# Altium PCB ee453_pcb_KangTouraj.PcbDoc (part 1 of 2)
Units mil, origin at the board's own origin, x right, y up, seen from the top; angles counter-clockwise.
Board outline 6000 x 5000 mil, 4 copper layers (Top Layer, PWR, GND, Bottom Layer), stack 53.912 mil thick; 92 components, 61 nets, 368 pads, 47 vias.
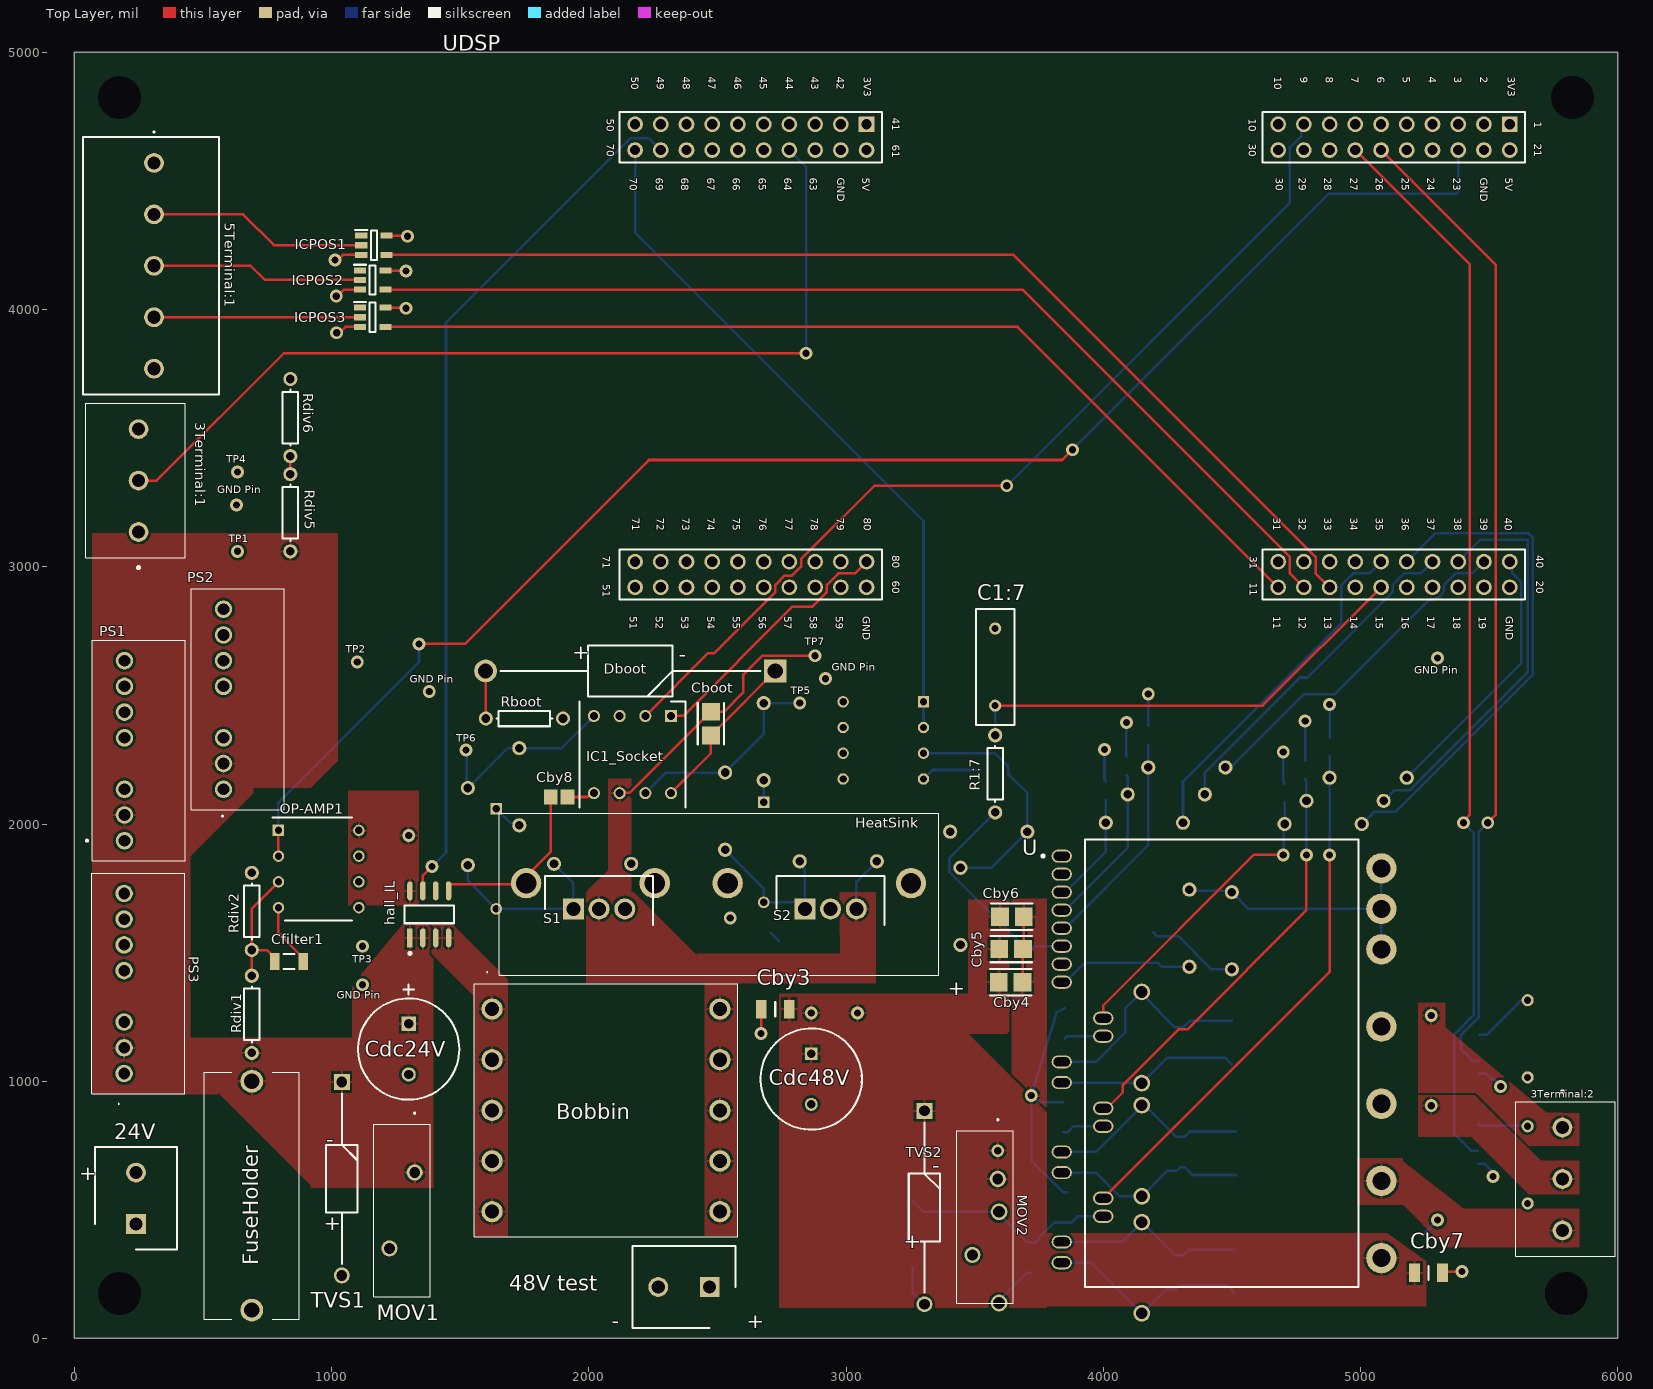
[diagram p0: Top Layer view]
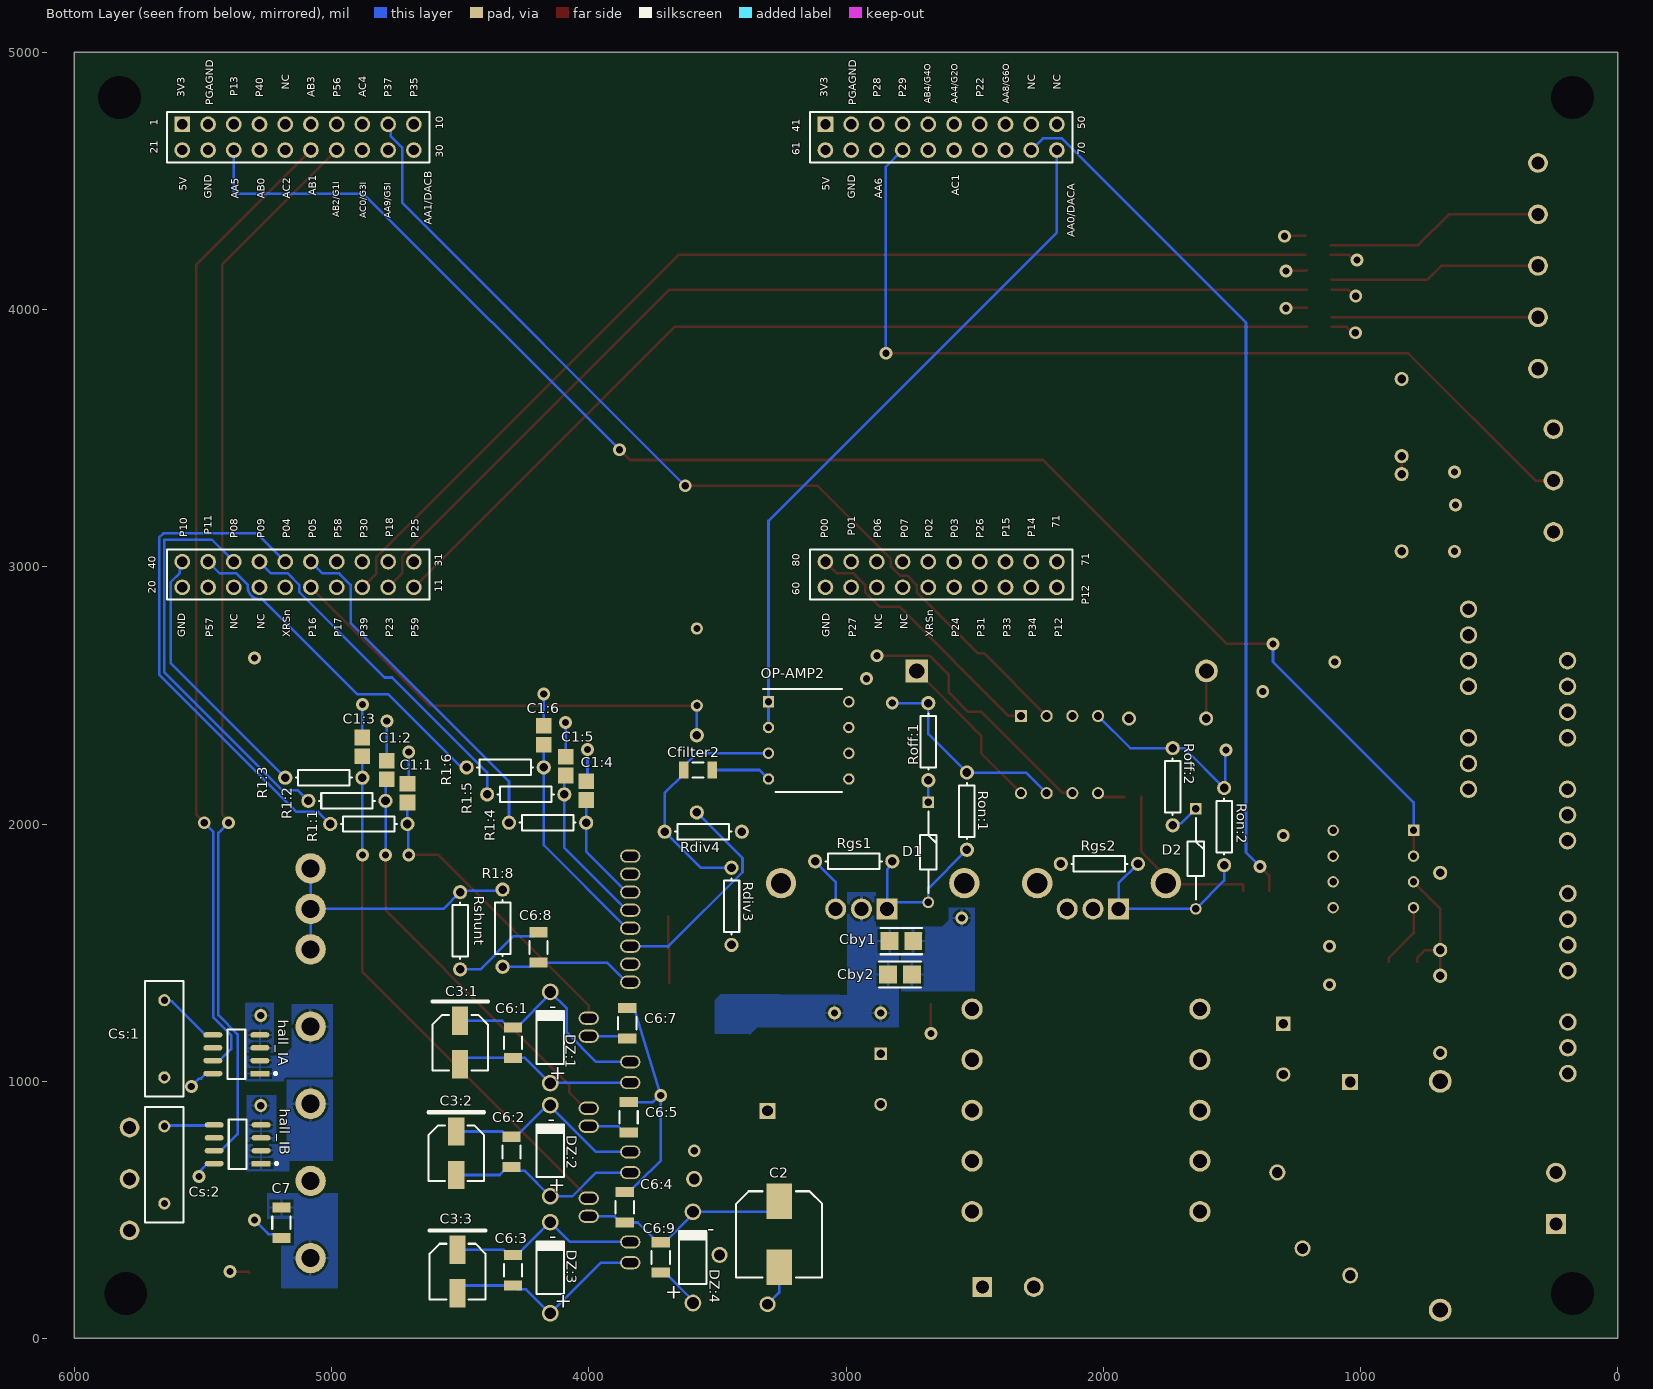
[diagram p1: Bottom Layer view, seen from below]
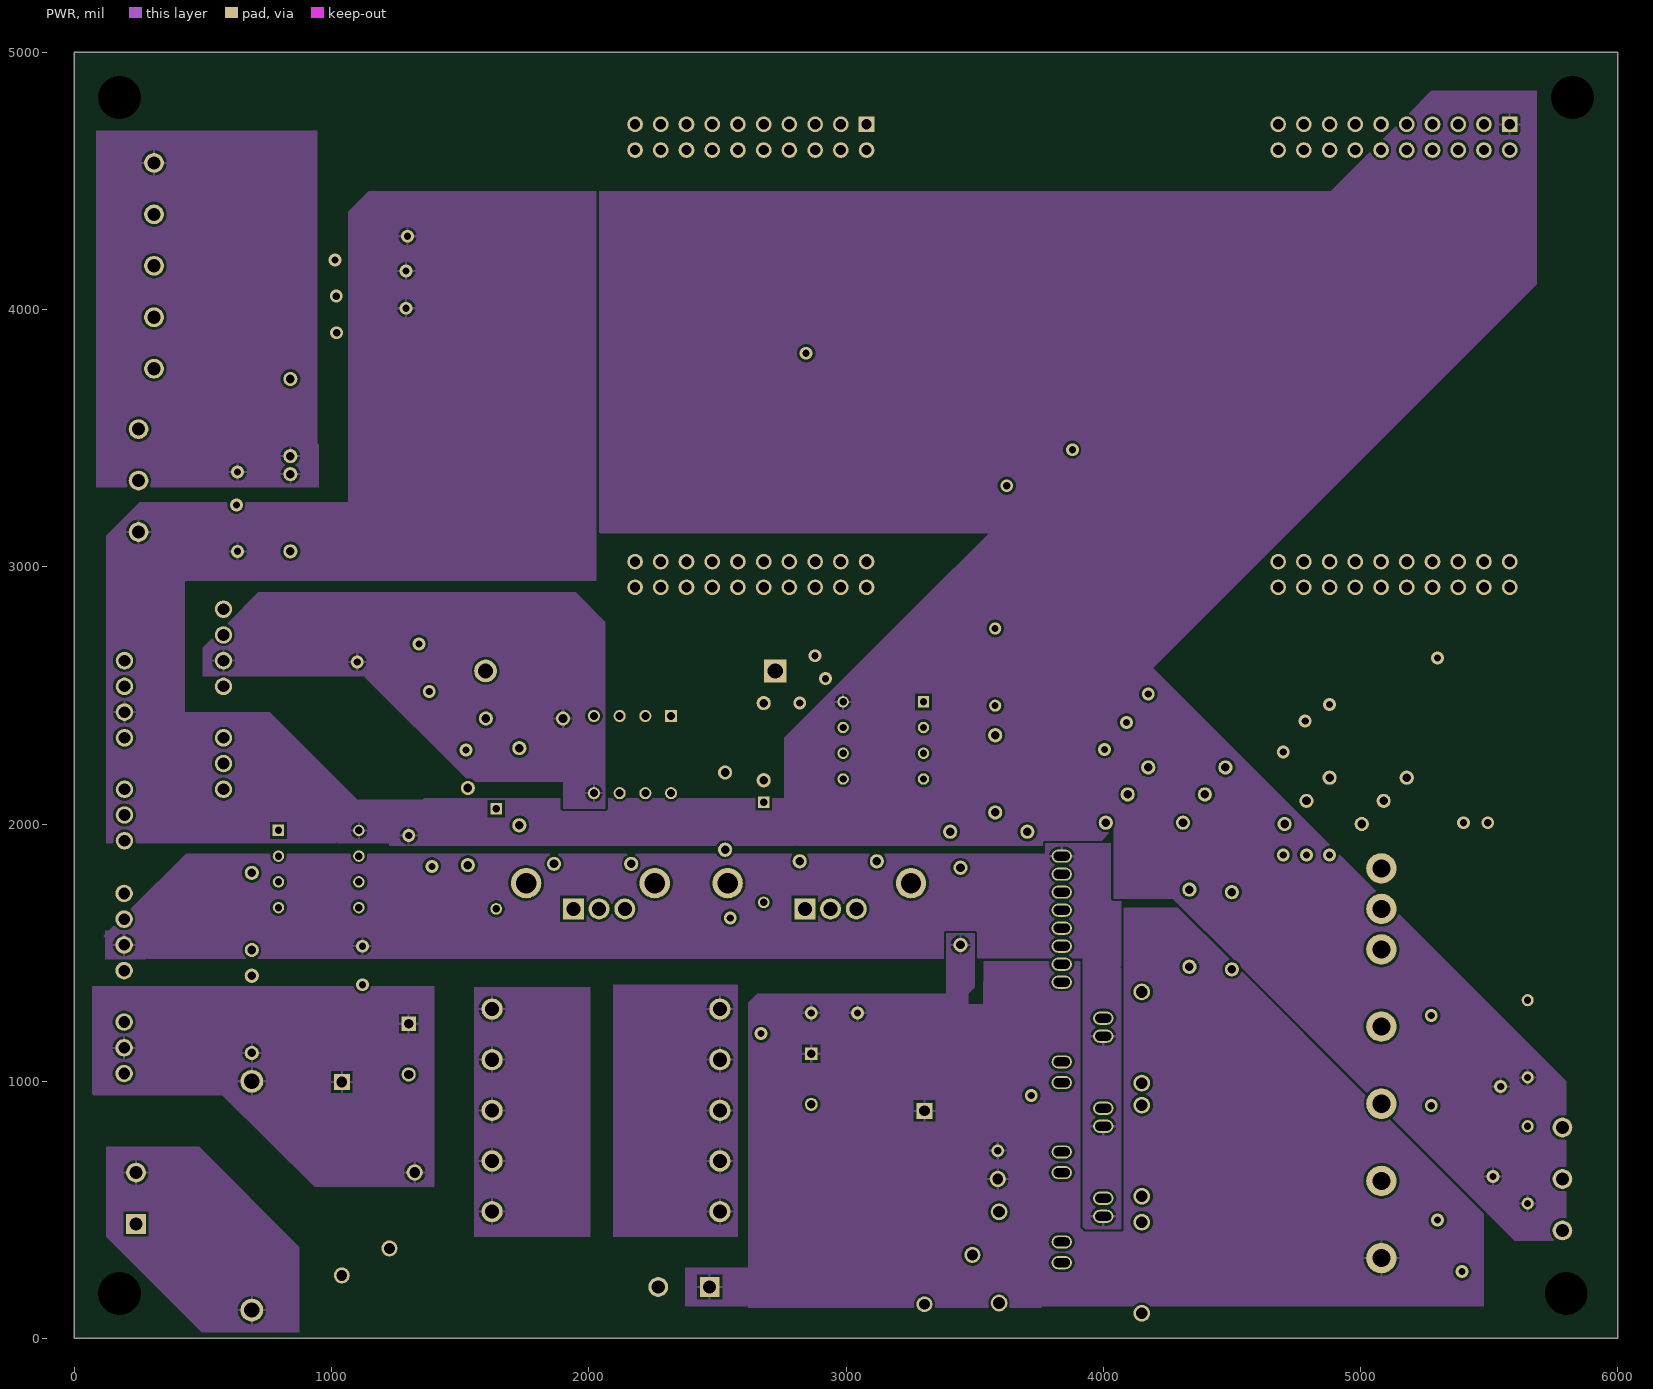
[diagram p2: PWR]
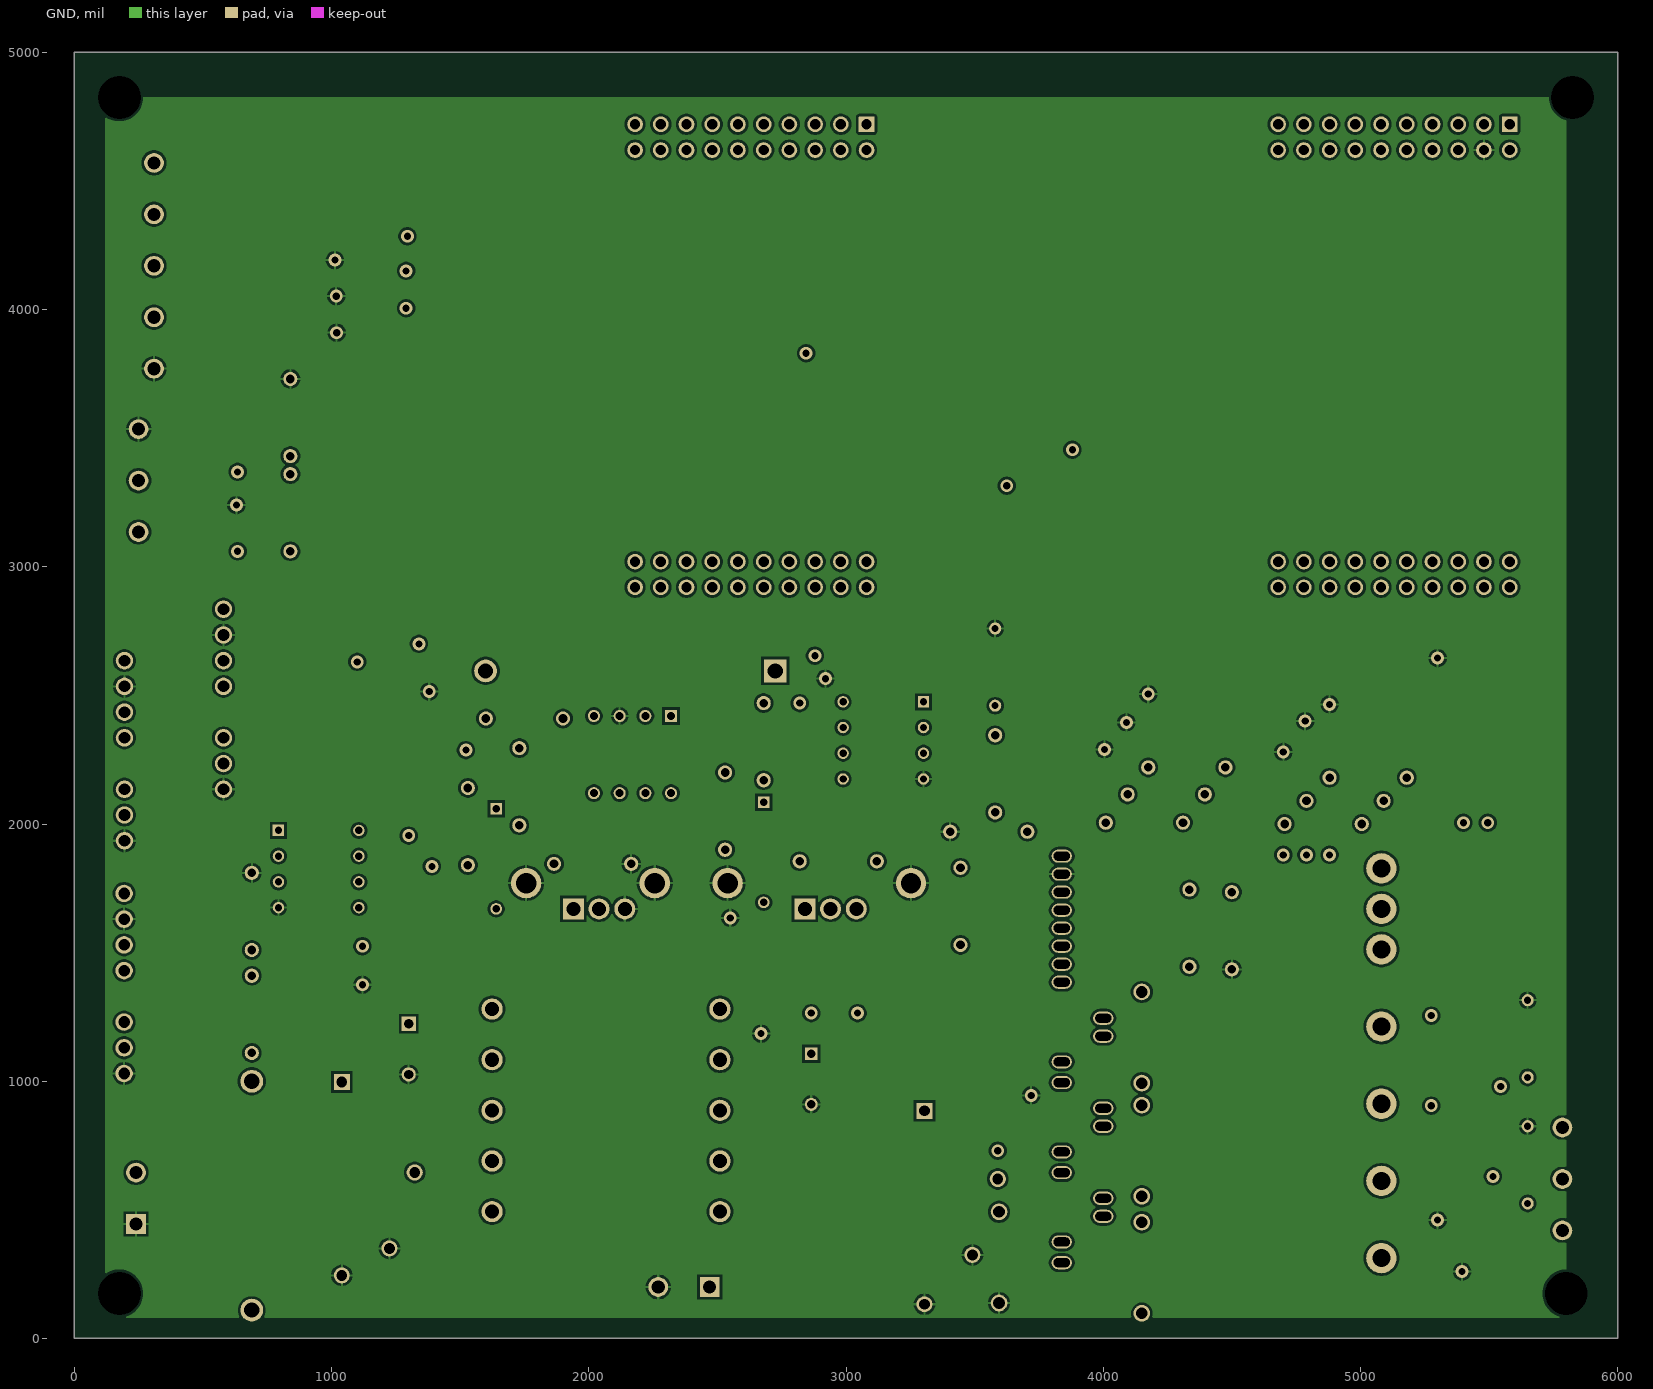
[diagram p3: GND]

## Layer stack, top to bottom
Top Solder: solder mask 1, SM-001, Dk 4
Top Layer: signal copper 1.378
Dielectric 1: prepreg 5.1, PP-017, Dk 4.3
Dielectric 2: prepreg 5.1, PP-017, Dk 4.3
PWR: signal copper 1.378
Dielectric 3: core 28, Core-039, Dk 4.8
GND: signal copper 1.378
Dielectric 4: prepreg 5.1, PP-017, Dk 4.3
Dielectric 5: prepreg 5.1, PP-017, Dk 4.3
Bottom Layer: signal copper 1.378
Bottom Solder: solder mask 1, SM-001, Dk 4

## Board outline
0,0 6000,0 6000,5000 0,5000

## Design rules (kind name [scope] priority, off if disabled: settings)
Clearance [All] p1: gap=10 ignorepadtopadclearanceinfootprint=FALSE
HoleSize [All] p1: absolutevalues=TRUE maxlimit=100 minlimit=10 maxpercent=80.000 minpercent=20.000
MinimumAnnularRing [All] p1: minimumring=10
PolygonConnect [All] p1: connectstyle=Relief reliefconductorwidth=10 reliefentries=4 polygonreliefangle="90 Angle" airgapwidth=10
RoutingVias [All] p1: holewidth=28 width=50 viastyle="Through Hole" minholewidth=28 minwidth=50 maxholewidth=28 maxwidth=50
SolderMaskExpansion [All] p1: expansion=4 istentingtop=FALSE
Width [All] p1: maxlimit=10 minlimit=10 preferedwidth=10
29 further rules are at their usual default settings.

## Classes and differential pairs
component class Sensors: 3Terminal:1 3Terminal:2 5Terminal:1 Cs:1 Cs:2 hall_IA hall_IB hall_IL ICPOS1 ICPOS2 ICPOS3
component class PowerSupply: 24V Cdc24V Cfilter1 FuseHolder MOV1 OP-AMP1 PS1 PS2 PS3 Rdiv1 Rdiv2 Rdiv5 Rdiv6 TVS1
component class DSP: UDSP
component class DrivePowerModule: C1:1 C1:2 C1:3 C1:4 C1:5 C1:6 C1:7 C2 C3:1 C3:2 C3:3 C6:1 C6:2 C6:3 C6:4 C6:5 C6:7 C6:8 C6:9 C7 DZ:1 DZ:2 DZ:3 DZ:4 R1:1 R1:2 R1:3 R1:4 R1:5 R1:6 R1:7 R1:8 Rshunt U
component class BoostStage: "48V test" Bobbin Cboot Cby1 Cby2 Cby4 Cby5 Cby6 Cby8 Cdc48V Cfilter2 D1 D2 Dboot HeatSink IC1_Socket MOV2 OP-AMP2 Rboot Rdiv3 Rdiv4 Rgs1 Rgs2 Roff:1 Roff:2 Ron:1 Ron:2 S1 S2 TVS2

## Components (designator, comment, footprint, x,y, rotation, side; value= is the part's Value field where it differs from the comment)
3Terminal:1 "1985917" 1985917 250,3135 r90 top
3Terminal:2 "1985917" 1985917 5785,820 r270 top
5Terminal:1 "1733606" 1733606 310,4570 r270 top
24V "1729128" HDRV2W110P0X508_1X2_1016X810X1000P 240,445 r90 top
"48V test" "1729128" HDRV2W110P0X508_1X2_1016X810X1000P 2470,200 r180 top
Bobbin "B66422W1010D1" B66422W1010D1 1624.17,1280.55 r270 top
C1:1 "1nF" CAPC2013X94X50ML20T25 4705,2120 r90 bottom
C1:2 "1nF" CAPC2013X94X50ML20T25 4785,2210 r90 bottom
C1:3 "1nF" CAPC2013X94X50ML20T25 4880,2300 r90 bottom
C1:4 "1nF" CAPC2013X94X50ML20T25 4010,2130 r90 bottom
C1:5 "1nF" CAPC2013X94X50ML20T25 4090,2225 r90 bottom
C1:6 "1nF" CAPC2013X94X50ML20T25 4175,2345 r90 bottom
C1:7 "Cap" RAD-0.3 3580,2610 r270 top value=1nF
C2 "150uF" NIC-CAPA2-8X10_V 3260,405 r270 bottom
C3:1 "22uF" PNSC-FP-V-C_V 4500,1150 r270 bottom
C3:2 "22uF" PNSC-FP-V-C_V 4515,720 r270 bottom
C3:3 "22uF" PNSC-FP-V-C_V 4510,260 r270 bottom
C6:1 "0.1uF" FP-CC1206-1_25-MFG 4295,1150 r270 bottom value="100 nF"
C6:2 "0.1uF" FP-CC1206-1_25-MFG 4300,725 r270 bottom value="100 nF"
C6:3 "0.1uF" FP-CC1206-1_25-MFG 4295,265 r270 bottom value="100 nF"
C6:4 "0.1uF" FP-CC1206-1_25-MFG 3860,510 r90 bottom value="100 nF"
C6:5 "0.1uF" FP-CC1206-1_25-MFG 3845,860 r90 bottom value="100 nF"
C6:7 "0.1uF" FP-CC1206-1_25-MFG 3850,1225 r90 bottom value="100 nF"
C6:8 "0.1uF" FP-CC1206-1_25-MFG 4195,1520 r90 bottom value="100 nF"
C6:9 "0.1uF" FP-CC1206-1_25-MFG 3720,315 r270 bottom value="100 nF"
C7 "0.1uF" FP-CC1206-1_25-MFG 5195,450 r270 bottom value="100 nF"
Cboot "1uF" FP-C3216-160-0_2-IPC_B 2475,2390 r90 top
Cby1 "1uF" FP-C3216-160-0_2-IPC_B 2785,1545 r180 bottom
Cby2 "1uF" FP-C3216-160-0_2-IPC_B 2790,1415 r180 bottom
Cby3 "10uF" CAPC3216X180N 2725,1280 r180 top
Cby4 "1uF" FP-C3216-160-0_2-IPC_B 3640,1385 r0 top
Cby5 "1uF" FP-C3216-160-0_2-IPC_B 3641.95,1513.87 r0 top
Cby6 "1uF" FP-C3216-160-0_2-IPC_B 3645,1640 r0 top
Cby7 "10uF" CAPC3216X180N 5265,255 r0 top
Cby8 "0.01uF" CAPC2013X94X50NL20T25 1885,2105 r180 top
Cdc24V "10uF" PNSC-EEU-EE2G100-2_V 1300,1125 r270 top
Cdc48V "100uF" CAPPRD500W65D1000H2200 2865,1106.85 r270 top
Cfilter1 "PLACEHOLDER" CAPC1206(3216)170_L 835,1465 r0 top value=680pF
Cfilter2 "PLACEHOLDER" CAPC1206(3216)170_L 3575,2210 r180 bottom value=680pF
Cs:1 "Cap" RAD-0.3 5650,1165 r90 bottom value=0.1uF
Cs:2 "Cap" RAD-0.3 5650,675 r90 bottom value=0.1uF
D1 "1N4148B" DIOAD990W55L340D162 2680,2085 r270 bottom
D2 "1N4148B" DIOAD990W55L340D162 1640,2059.76 r270 bottom
Dboot "SB3H100-E3_54" DIOAD2855W132L835D505 2725,2595 r180 top
DZ:1 "1N4748A" FAIR-DO-41-2_V 4150,1170 r90 bottom
DZ:2 "1N4748A" FAIR-DO-41-2_V 4150,730 r90 bottom
DZ:3 "1N4748A" FAIR-DO-41-2_V 4150,275 r90 bottom
DZ:4 "1N4748A" FAIR-DO-41-2_V 3595,315 r90 bottom
FuseHolder "0PTF0078P" 0PTF0078P 690,555 r90 top
hall_IA "ACS723LLCTR-20AB-T" FP-LC-8-IPC_C 5370,1105 r0 bottom
hall_IB "ACS723LLCTR-20AB-T" FP-LC-8-IPC_C 5365,755 r0 bottom
hall_IL "ACS723LLCTR-20AB-T" FP-LC-8-IPC_C 1380,1648.82 r90 top
HeatSink "WV-DT2-101E" WVDT2101E 1756.54,1770 r0 top
IC1_Socket "DILB8P-223TLF" DIPS762W60P254L1016H525Q8N 2320,2420 r270 top
ICPOS1 "SN74LV1T34DBVRG4" SOT95P280X145-5N 1165,4250 r0 top
ICPOS2 "SN74LV1T34DBVRG4" SOT95P280X145-5N 1160,4115 r0 top
ICPOS3 "SN74LV1T34DBVRG4" SOT95P280X145-5N 1160,3970 r0 top
MOV1 "V68ZS10P" V68ZS10P 1323.43,645.28 r270 top
MOV2 "V68ZS10P" V68ZS10P 3590,620 r270 top
OP-AMP1 "LMC6482IN_NOPB" DIP794W53P254L959H508Q8N 950,1825 r0 top
OP-AMP2 "LMC6482IN_NOPB" DIP794W53P254L959H508Q8N 3145,2325 r180 bottom
PS1 "RS3-2415D" RS32405DH3 195,1935 r90 top
PS2 "RS3-2412S" RS32415S 580,2135 r90 top
PS3 "RS3-243.3S" RS32433S 193.66,1030 r90 top
R1:1 "Res1" AXIAL-0.3 4855,2000 r0 bottom value=R1
R1:2 "Res1" AXIAL-0.3 4940,2090 r0 bottom value=R1
R1:3 "Res1" AXIAL-0.3 5030,2180 r0 bottom value=R1
R1:4 "Res1" AXIAL-0.3 4160,2005 r0 bottom value=R1
R1:5 "Res1" AXIAL-0.3 4245,2115 r0 bottom value=R1
R1:6 "Res1" AXIAL-0.3 4325,2220 r0 bottom value=R1
R1:7 "Res1" AXIAL-0.3 3580,2195 r90 top value=R1
R1:8 "Res1" AXIAL-0.3 4335,1595 r90 bottom value=R6
Rboot "Rboot" AXIAL-0.3 1750,2410 r0 top value=10
Rdiv1 "R" AXIAL-0.3 690,1260 r270 top value=6.27k
Rdiv2 "R" AXIAL-0.3 690,1660 r270 top value=1k
Rdiv3 "Rdiv1" AXIAL-0.3 3445,1680 r270 bottom value=13.5k
Rdiv4 "Rdiv2" AXIAL-0.3 3555,1970 r0 bottom value=1k
Rdiv5 "R" AXIAL-0.3 840,3210 r90 top value=38k
Rdiv6 "R" AXIAL-0.3 840,3580 r90 top value=10k
Rgs1 "R" AXIAL-0.3 2970,1855 r0 bottom value=10k
Rgs2 "R" AXIAL-0.3 2015,1845 r0 bottom value=10k
Roff:1 "Roff" AXIAL-0.3 2680,2320 r270 bottom value=10
Roff:2 "Roff" AXIAL-0.3 1730,2145 r270 bottom value=10
Ron:1 "Ron" AXIAL-0.3 2530,2050 r270 bottom value=8
Ron:2 "Ron" AXIAL-0.3 1530,1990 r270 bottom value=8
Rshunt "Res1" AXIAL-0.3 4500,1585 r90 bottom value=RShunt
S1 "IRFB4615PBF" TO254P483X1016X1994-3P 1940,1670 r0 top
S2 "IRFB4615PBF" TO254P483X1016X1994-3P 2840,1670 r0 top
TVS1 "P6KE91A-E3_54" DIOAD1910W86L670D310 1040,996.97 r270 top
TVS2 "P6KE91A-E3_54" DIOAD1910W86L670D310 3305,885 r270 top
U "FNB34060T" FNB34060T 4460,1070 r90 top locked
UDSP "C2000" C2000 3880,3820 r0 top

## Footprints (in the part's own frame and the unit in brackets; to place one, negate y for a bottom-side part, rotate by r counter-clockwise, add the part's x,y. Pads: shape width x height; smd on the part's side, far side on the other; paste and mask are expansions set on the pad)
0PTF0078P [mm]
  round 2.25 hole 1.5: 1(-11.3,0) 2(11.3,0)
  silkscreen extent -12.2,-4.7 12.2,4.7, body extent -12.2,-4.7 12.2,4.7, height 11.6
1733606 [mm]
  round 1.95 hole 1.3: 1(0,0) 2(5.08,0) 3(10.16,0) 4(15.24,0) 5(20.32,0)
  silkscreen extent -3.1,-7 22.86,6.4, body extent -2.54,-7 22.86,6.4, height 15.55
1985917 [mm]
  round 1.95 hole 1.3: 1(0,0) 2(5.08,0) 3(10.16,0)
  silkscreen extent -3.62,-4.6 12.7,5.2, body extent -2.54,-4.6 12.7,5.2, height 14.05
AXIAL-0.3 [mm] "Axial Device, Thru-Hole; 2 Leads; 0.3 in Pin Spacing"
  round 1.4 hole 0.85: 1(-3.81,0) 2(3.81,0)
  silkscreen extent -2.77,-0.76 2.77,0.76
B66422W1010D1 [mm]
  round 2.1 hole 1.4: 1(0,0) 2(5,0) 3(10,0) 4(15,0) 5(20,0) 6(20,22.5) 7(15,22.5) 8(10,22.5) 9(5,22.5) 10(0,22.5)
  silkscreen extent -3.7,-1.75 22.5,24.25, body extent -2.5,-1.75 22.5,24.25, height 12
C2000 [mm]
  rrect6% 1.55x1.55 hole 1.02: 1(43.18,22.86) 41(-20.32,22.86)
  round 1.55 hole 1.02: 2(40.64,22.86) 3(38.1,22.86) 4(35.56,22.86) 5(33.02,22.86) 6(30.48,22.86) 7(27.94,22.86) 8(25.4,22.86) 9(22.86,22.86) 10(20.32,22.86) 11(20.32,-22.86) 12(22.86,-22.86) 13(25.4,-22.86) 14(27.94,-22.86) 15(30.48,-22.86) 16(33.02,-22.86) 17(35.56,-22.86) 18(38.1,-22.86) 19(40.64,-22.86) 20(43.18,-22.86) 21(43.18,20.32) 22(40.64,20.32) 23(38.1,20.32) 24(35.56,20.32) 25(33.02,20.32) 26(30.48,20.32) 27(27.94,20.32) 28(25.4,20.32) 29(22.86,20.32) 30(20.32,20.32) 31(20.32,-20.32) 32(22.86,-20.32) 33(25.4,-20.32) 34(27.94,-20.32) 35(30.48,-20.32) 36(33.02,-20.32) 37(35.56,-20.32) 38(38.1,-20.32) 39(40.64,-20.32) 40(43.18,-20.32) 42(-22.86,22.86) 43(-25.4,22.86) 44(-27.94,22.86) 45(-30.48,22.86) 46(-33.02,22.86) 47(-35.56,22.86) 48(-38.1,22.86) 49(-40.64,22.86) 50(-43.18,22.86) 51(-43.18,-22.86) 52(-40.64,-22.86) 53(-38.1,-22.86) 54(-35.56,-22.86) 55(-33.02,-22.86) 56(-30.48,-22.86) 57(-27.94,-22.86) 58(-25.4,-22.86) 59(-22.86,-22.86) 60(-20.32,-22.86) 61(-20.32,20.32) 62(-22.86,20.32) 63(-25.4,20.32) 64(-27.94,20.32) 65(-30.48,20.32) 66(-33.02,20.32) 67(-35.56,20.32) 68(-38.1,20.32) 69(-40.64,20.32) 70(-43.18,20.32) 71(-43.18,-20.32) 72(-40.64,-20.32) 73(-38.1,-20.32) 74(-35.56,-20.32) 75(-33.02,-20.32) 76(-30.48,-20.32) 77(-27.94,-20.32) 78(-25.4,-20.32) 79(-22.86,-20.32) 80(-20.32,-20.32)
  silkscreen extent -44.7,-24.07 44.7,24.07, body extent -44.7,-24.07 44.7,24.07, height 8.51
CAPC1206(3216)170_L [mm] "Chip Capacitor, Body 3.2x1.6mm, Height 1.7mm, IPC High Density"
  rect 0.95x1.7 smd: 1(-1.4,0) 2(1.4,0)
  silkscreen extent -0.55,-0.75 0.55,0.75, body extent -1.7,-0.9 1.7,0.9, height 1.7
CAPC2013X94X50ML20T25 [mm] "Chip Capacitor, 2-Leads, Body 2.01x1.25mm, IPC Low Density"
  rect 1.55x1.55 smd: 1(-0.925,0) 2(0.925,0)
  body extent -1.1,-0.72 1.11,0.72, height 0.94
CAPC2013X94X50NL20T25 [mm] "Chip Capacitor, 2-Leads, Body 2.01x1.25mm, IPC Medium Density"
  rect 1.35x1.45 smd: 1(-0.825,0) 2(0.825,0)
  body extent -1.1,-0.72 1.11,0.72, height 0.94
CAPC3216X180N [mm]
  rect 1.07x1.82 smd: 1(-1.38,0) 2(1.38,0)
  silkscreen extent 0,-0.7 0,0.7, body extent -1.6,-0.8 1.6,0.8, height 1.8
CAPPRD500W65D1000H2200 [mm]
  rect 1.275x1.275 hole 0.85: 1(0,0)
  round 1.275 hole 0.85: 2(5,0)
  silkscreen extent -2.5,-5 7.5,5, body extent -2.75,-5.25 7.75,5.25, height 22
DIOAD990W55L340D162 [mm]
  rect 1.15x1.15 hole 0.75: 1(0,0)
  round 1.15 hole 0.75: 2(9.9,0)
  silkscreen extent 0.92,-0.81 8.98,0.81, body extent -0.27,-0.87 10.17,0.87, height 1.74
DIOAD1910W86L670D310 [mm]
  rect 1.575x1.575 hole 1.05: 1(0,0)
  round 1.575 hole 1.05: 2(19.1,0)
  silkscreen extent 1.14,-1.55 17.96,1.55, body extent -0.43,-1.8 19.53,1.8, height 3.6
DIOAD2855W132L835D505 [mm]
  rect 2.25x2.25 hole 1.5: 1(0,0)
  round 2.25 hole 1.5: 2(28.6,0)
  silkscreen extent 1.48,-2.52 27.13,2.52, body extent -0.65,-2.65 29.21,2.65, height 5.3
DIP794W53P254L959H508Q8N [mm]
  rect 1.13x1.13 hole 0.73: 1(-3.97,3.81)
  round 1.13 hole 0.73: 2(-3.97,1.27) 3(-3.97,-1.27) 4(-3.97,-3.81) 5(3.97,-3.81) 6(3.97,-1.27) 7(3.97,1.27) 8(3.97,3.81)
  silkscreen extent -4.53,-5.08 3.3,5.08, body extent -4.1,-4.79 4.1,4.79, height 5.08
DIPS762W60P254L1016H525Q8N [mm]
  rect 1.2x1.2 hole 0.8: 1(0,0)
  round 1.2 hole 0.8: 2(0,-2.54) 3(0,-5.08) 4(0,-7.62) 5(7.62,-7.62) 6(7.62,-5.08) 7(7.62,-2.54) 8(7.62,0)
  silkscreen extent -1.42,-9.04 9.04,1.42
FAIR-DO-41-2_V [mm] "2-Leads, Axial leaded, Body 2.72x5.2mm, Pin Spacing 9mm"
  round 1.65 hole 1.15: 1(-4.5,0) 2(4.5,0)
  silkscreen extent -2.6,-1.36 2.6,1.36, body extent -4.93,-1.36 4.93,1.36, height 2.71
FNB34060T [mm]
  oval 1.3x2 hole 1.6 slot 0.9 at 0 deg paste-1000 mask+0: 1(20.447,15.78) 2(18.669,15.78) 3(16.891,15.78) 4(15.113,15.78) 5(13.335,15.78) 6(11.557,15.78) 7(9.779,15.78) 8(8.001,15.78) 9(4.445,11.68) 10(2.667,11.68) 11(0.136,15.78) 12(-1.914,15.78) 13(-4.445,11.68) 14(-6.223,11.68) 15(-8.754,15.78) 16(-10.804,15.78) 17(-13.335,11.68) 18(-15.113,11.68) 19(-17.644,15.78) 20(-19.694,15.78)
  round 3 hole 1.8 paste-1000 mask+0: 21(19.24,-15.78) 22(15.24,-15.78) 23(11.24,-15.78) 24(3.62,-15.78) 25(-4,-15.78) 26(-11.62,-15.78) 27(-19.24,-15.78)
  silkscreen extent -22.1,-13.5 22.1,17.75, body extent -21.96,-16.1 21.97,16.38, height 5.61
FP-C3216-160-0_2-IPC_B [mil]
  rect 69.05x71.11 smd paste+0 mask+0: 1(-46.3,0) 2(46.3,0)
  silkscreen extent -81,-51 81,51, body extent -91,-45 91,45, height 10
FP-CC1206-1_25-MFG [mm]
  rect 1x1.8 smd paste+0 mask+0: 1(-1.5,0) 2(1.5,0)
  silkscreen extent -0.63,-0.9 0.63,0.9, body extent -1.6,-0.8 1.6,0.8, height 1.45
FP-LC-8-IPC_C [mil]
  rect 73.78x21.34 smd paste+0 mask+0: 1(-91.18,75)
  rrect100% 73.78x21.34 smd paste+0 mask+0: 2(-91.18,25) 3(-91.18,-25) 4(-91.18,-75) 5(91.18,-75) 6(91.18,-25) 7(91.18,25) 8(91.18,75)
  silkscreen extent -156,-96 35,96, body extent -118,-96 118,96, height 69
HDRV2W110P0X508_1X2_1016X810X1000P [mm]
  rect 1.95x1.95 hole 1.3: 1(0,0)
  round 1.95 hole 1.3: 2(5.08,0)
  silkscreen extent -2.54,-4.05 7.62,4.05, body extent -2.54,-4.05 7.62,4.05, height 10
NIC-CAPA2-8X10_V [mm] "Aluminum Electrolytic Capacitor, Diameter 8mm, Height 10.8mm, Pitch 6.5mm"
  rect 3.5x2.5 smd: 1(-3.25,0) 2(3.25,0)
  silkscreen extent -4.25,-4.25 4.25,4.25, body extent -4,-4 4,4, height 10.8
PNSC-EEU-EE2G100-2_V [mm] "Through-hole, 2-Leads, Base 10x10mm, Height 22mm"
  rect 1.4x1.4 hole 0.9: 1(-2.5,0)
  round 1.4 hole 0.9: 2(2.5,0)
  silkscreen extent -6.4,-5 5,5, body extent -5,-5 5,5, height 22
PNSC-FP-V-C_V [mm] "CAPAE, 2-Leads, Body 5.50x5.50mm"
  rect 2.8x1.6 smd: 1(-2.15,0) 2(2.15,0)
  silkscreen extent -4.05,-2.75 2.75,2.75, body extent -3.25,-2.75 3.25,2.75, height 6.1
RAD-0.3 [mm] "Radial Cap, Thru-Hole; 2 Leads; 0.3 in Pin Spacing"
  round 1.2 hole 0.7: 1(-3.81,0) 2(3.81,0)
  silkscreen extent -5.71,-1.91 5.71,1.91
RS32405DH3 [mm]
  round 1.725 hole 1.15: 1(0,0) 2(2.54,0) 3(5.08,0) 5(10.16,0) 6(12.7,0) 7(15.24,0) 8(17.78,0)
  silkscreen extent -2,-6 19.8,3.8, body extent -2,-6 19.8,3.2, height 11.45
RS32415S [mm]
  round 1.725 hole 1.15: 1(0,0) 2(2.54,0) 3(5.08,0) 5(10.16,0) 6(12.7,0) 7(15.24,0) 8(17.78,0)
  silkscreen extent -2.71,-6 19.79,3.2, body extent -2.01,-6 19.79,3.2, height 11.45
RS32433S [mm]
  round 1.725 hole 1.15: 1(0,0) 2(2.54,0) 3(5.08,0) 5(10.16,0) 6(12.7,0) 7(15.24,0) 8(17.78,0)
  silkscreen extent -3.05,-6 19.79,3.2, body extent -2.01,-6 19.79,3.2, height 11.45
SOT95P280X145-5N [mm]
  rect 1.2x0.6 smd: 1(-1.25,0.95) 2(-1.25,0) 3(-1.25,-0.95) 4(1.25,-0.95) 5(1.25,0.95)
  silkscreen extent -1.85,-1.45 0.3,1.5, body extent -1.4,-1.45 1.4,1.45, height 1.45
TO254P483X1016X1994-3P [mm]
  rect 2.07x2.07 hole 1.38: 1(0,0)
  round 2.07 hole 1.38: 2(2.54,0) 3(5.08,0)
  silkscreen extent -2.8,-1.61 7.88,3.22, body extent -2.54,-1.61 7.62,3.22, height 18.86
V68ZS10P [mm]
  round 1.59 hole 1.06: 1(0,0) 2(7.5,-2.5)
  silkscreen extent -5.9,-4.05 12.25,1.55, body extent -4.75,-4.05 12.25,1.55, height 20.1
WVDT2101E [mm]
  round 3 hole 2: 1(0,0) 2(12.7,0) 3(19.9,0) 4(38,0)
  silkscreen extent -2.65,-9.11 40.75,6.89, body extent -2.65,-9.11 40.75,6.89, height 32.4

## Part data
3Terminal:1 3Terminal:2: "Connector", Manufacturer_Name="Phoenix Contact", Mouser Part Number=651-1985917, Arrow Part Number=1985917, Arrow Price/Stock=https://www.arrow.com/en/products/1985917/phoenix-contact, Datasheet Link=https://media.digikey.com/pdf/Data%20Sheets/Phoenix%20Contact%20PDFs/Multi-Postion%20PCTerminal%20Blocks.pdf, Height=13.95mm, Manufacturer_Part_Number=1985917, Mouser Price/Stock=https://www.mouser.co.uk/ProductDetail/Phoenix-Contact/1985917/?qs=ibOxrZ%2Fd8eDdpJplVMXgvQ%3D%3D
5Terminal:1: "Connector", Manufacturer_Name="Phoenix Contact", Mouser Part Number=651-1733606, Arrow Part Number=1733606, Arrow Price/Stock=https://www.arrow.com/en/products/1733606/phoenix-contact, Datasheet Link=https://www.phoenixcontact.com/online/portal/us?uri=pxc-oc-itemdetail:pid=1733606&library=usen&tab=1, Height=15.45mm, Manufacturer_Part_Number=1733606, Mouser Price/Stock=https://www.mouser.co.uk/ProductDetail/Phoenix-Contact/1733606/?qs=coeDwHeOZKnxpzvXWWKBZQ%3D%3D
24V "48V test": "Connector", Manufacturer_Name="Phoenix Contact", Mouser Part Number=651-1729128, Arrow Part Number=1729128, Arrow Price/Stock=https://www.arrow.com/en/products/1729128/phoenix-contact, Datasheet Link=http://docs-emea.rs-online.com/webdocs/1380/0900766b81380189.pdf, Height=10mm, Manufacturer_Part_Number=1729128, Mouser Price/Stock=https://www.mouser.co.uk/ProductDetail/Phoenix-Contact/1729128?qs=GFUSqQMLmmnCBVBY3dts9w%3D%3D
Bobbin: "Bobbin", Manufacturer_Name=EPCOS, Mouser2 Part Number=871-B66422W1010D1, Datasheet Link=https://componentsearchengine.com/Datasheets/1/B66422W1010D1.pdf, Height=12mm, Manufacturer_Part_Number=B66422W1010D1, Mouser2 Price/Stock=https://www.mouser.com/Search/Refine.aspx?Keyword=871-B66422W1010D1
C1:1 C1:2 C1:3 C1:4 C1:5 C1:6: library part CMP-1036-02979-2, "1nF Ceramic Cap 50V", Manufacturer="AVX Interconnect / Elco", Part Number=08055C102KAT2A.
C1:7 Cs:1 Cs:2: "Capacitor", LatestRevisionDate=17-Jul-2002, LatestRevisionNote="Re-released for DXP Platform.", PackageDescription="Radial Cap, Thru-Hole; 2 Leads; 0.3 in Pin Spacing", PackageReference=RAD-0.3, Published=8-Jun-2000, Publisher="Altium Limited"
C2: library part CMP-0687-00078-1, "Aluminum Electrolytic Capacitor, UD Series, Low Impedance, 150 uF, 35 V, + / - 20%, -55 to 105 degC, Chip Type, 8 x 10 mm D x L, Pb-Free, Reel", Manufacturer=Nichicon, PartNumber=UUD1V151MNL1GS, Rated Capacitance="150 uF", Rated Ripple Current (at 100kHz)="450 mA", Rated Voltage="35 V", Tolerance Rated Capacitance="-20 to 20%", ComponentLink1Description="Manufacturer URL", ComponentLink1URL=http://www.nichicon.co.jp/, ComponentLink2Description=Datasheet, ComponentLink2URL=http://products.nichicon.co.jp/en/pdf/XJA043/e-ud.pdf, ComponentLink3Description="Package Specification", ComponentLink3URL=http://products.nichicon.co.jp/en/pdf/XJA043/e-ud.pdf, DatasheetVersion=08/2012, Diameter="8 mm", Endurance Time="5000 h", Impedance="0.17 Ohm", Length="10 mm", Mounting Technology="Surface Mount", PackageDescription="2-Pin Surface Mount Device, Diameter 8 mm, Height 10 mm, Pitch 6.5 mm", PackageReference=CAPAE-D8H10, Packing="Dia382mm Reel", RoHS=TRUE
C3:1 C3:2 C3:3: library part CMP-2000-06213-1, "Aluminum Electrolytic Capacitor, 22 uF, +/- 20%, 25 V, 2-Pin SMD (Size Code C), -55 to 105 degC, RoHS, Tape and Reel", Capacitance=22µF, Case Size/Dimension=Ø5x5.8mm, ESR (Equivalent Series Resistance)=0.36O, Lifetime@Temperature=2000Hrs@105°C, Manufacturer=Panasonic, Operating Temp Range=-55to+105°C, Operating Temp-Max=105°C, Package Description="2-Pin Electrolytic Aluminum Capacitor, Body 5.3 x 5.3 mm", Package Reference=FP-V-C, Rated Voltage=25V, Ripple Current=240mA, Datasheet URL=http://industrial.panasonic.com/cdbs/www-data/pdf/RDE0000/ABA0000C1184.pdf, Datasheet Version=03/2016, Manufacturer URL=http://www.panasonic.com/, Mounting Technology=SurfaceMount, Package URL=http://industrial.panasonic.com/cdbs/www-data/pdf/RDE0000/DME0000COL48.pdf, Series=FP, Type=Can
C6:1 C6:2 C6:3 C6:4 C6:5 C6:7 C6:8 C6:9 C7: library part CMP-03422-000130-1, "CC1206 100 nF X7R 10.00%50 V", Capacitance="100 nF", Manufacturer=Yageo, Manufacturer Part Number=CC1206KPX7R9BB104, Package=CC1206-1.25, Temperature="-55°C to +125°C", Temperature Characteristic=X7R, Temperature Coefficient=15%, Temperature Range High=+125°C, Temperature Range Low=-55°C, Tolerance=0.1, Voltage Rating="50 V", Automotive=No, Automotive Grade=NA, Category=Cap, ComponentLink2Description=Datasheet, ComponentLink2URL=http://www.yageo.com/documents/recent/UPY-NP0X7R_HV_1KV-to-3KV_11.pdf, Device Class L1="Passive Components", Device Class L2=Capacitors, Device Class L3="Ceramic Capacitors", Footprint Url=http://www.yageo.com/exep/pages/download/literatures/UPY-C_GEN_24.pdf, Height=1.45mm, Lead Free=Yes, Material=Ceramic, Mouser Description="Surface Mount Ceramic Multilayer Capacitor 0.1uF 10% X7R 50V 1206 Paper T/R", Octopart=https://octopart.com/cc1206kpx7r9bb104-yageo-16251820, RoHS=TRUE
Cboot Cby1 Cby2 Cby4 Cby5 Cby6: library part CMP-08246-003576-1, "Multilayer Ceramic Capacitors 1uF ±20% 50V JB SMD 1206", Case Code (Imperial)=1206, Case Code (Metric)=3216, Dielectric Material=Ceramic, Max Operating Temperature=85°C, Min Operating Temperature=-25°C, Package Quantity=2000, Tolerance=20%, Voltage Rating=50V, Capacitance=1uF, Case/Package=1206, Height=1.6mm, Lead Free="Lead Free", Length=0.126inch, Mount="Surface Mount", Packaging="Tape and Reel", Resistor Type=Ceramic, Series=C, Termination=SMD/SMT, Thickness=0.069inch, Voltage Rating (DC)=50V, Width=1.6mm
Cby3 Cby7: library part GRM31CR61H106KA12K, "Capacitor Ceramic 10uF", Manufacturer_Name="Murata Electronics", Mouser Part Number=81-GRM31CR61H106KA2K, Datasheet Link=http://www.murata.com/~/media/webrenewal/support/library/catalog/products/capacitor/mlcc/c02e.pdf, Height=1.8mm, Manufacturer_Part_Number=GRM31CR61H106KA12K, Mouser Price/Stock=https://www.mouser.co.uk/ProductDetail/Murata-Electronics/GRM31CR61H106KA12K?qs=hNud%2FORuBR2LdVXo%252BGUPLw%3D%3D
Cby8: library part CMP-2007-04362-1, Manufacturer="AVX Interconnect / Elco", Part Number=08055C103K4Z2A
Cdc24V: library part CMP-0736-00002-1, "Aluminum Electrolytic Capacitor, 10 uF +/- 20%, 400 V, -25 to 105 degC, 2-Pin 10 x 10 x 22 mm Through-hole, RoHS, Tape and Reel", Capacitance Tolerance="+/- 20%", Manufacturer=Panasonic, PartNumber=EEU-EE2G100, Rated Voltage="400 V", Ripple Current="430 mA", Temp. Range="-25 to 105 degC", Cap.="10 uF", ComponentLink1Description="Manufacturer URL", ComponentLink1URL=http://industrial.panasonic.com/, ComponentLink2Description=Datasheet, ComponentLink2URL=http://industrial.panasonic.com/www-data/pdf/ABA0000/ABA0000CE113.pdf, ComponentLink3Description="Package Specification", ComponentLink3URL=http://industrial.panasonic.com/www-data/pdf/ABA0000/ABA0000PE245.pdf, DatasheetVersion=Nov-12, Mounting Technology="Through Hole", PackageDescription="2-Pin Through-hole, Base 10 x 10 mm, Height 22 mm", PackageReference=EEU-EE2G100-2, PackageVersion=Nov-12, Packing="Tape and Reel", RoHS=TRUE
Cdc48V: library part EEU-FR2A101, "100uF Capacitor Polarised", Manufacturer_Name=Panasonic, Mouser Part Number=667-EEU-FR2A101, Datasheet Link=https://industrial.panasonic.com/cdbs/www-data/pdf/RDF0000/ABA0000C1259.pdf, Height=22mm, Manufacturer_Part_Number=EEU-FR2A101, Mouser Price/Stock=https://www.mouser.co.uk/ProductDetail/Panasonic/EEU-FR2A101?qs=n7vHx8wJlDHCZg6DRLuY%252Bw%3D%3D
Cfilter1 Cfilter2: library part CMP-1037-02291-1, "CAP 680pF 50V ±1% 1206 (3216 Metric) Thickness 1.7mm SMD", Case-EIA=1206, Case-Metric=3216, Rated Voltage="50 V", Tolerance=Â±1%, Max Thickness="1.7 mm", Technology=SMT
D1 D2: "Diode", Manufacturer_Name=Vishay, Datasheet Link=https://www.vishay.com/docs/81857/1n4148.pdf, Manufacturer_Part_Number=1N4148B
Dboot: "Schottky Diode", Manufacturer_Name=Vishay, Manufacturer_Part_Number=SB3H100-E3/54, Mouser Part Number=625-SB3H100-E3, Datasheet Link=http://www.vishay.com/docs/88720/sb3h90.pdf, Mouser Price/Stock=https://www.mouser.com/Search/Refine.aspx?Keyword=625-SB3H100-E3
DZ:1 DZ:2 DZ:3 DZ:4: library part CMP-0892-00021-1, "Zener Diode, 22V, 1W, 5%, -65 to 200 degC, 2-Pin DO-41, Body 2.72 x 5.2 mm, RoHS", Manufacturer="Fairchild Semiconductor", Operating and Storage Temperature Range="-65 to 200 degC", Test Current IZ (mA)=11.5, Tolerance=5%, ComponentLink1Description="Manufacturer URL", ComponentLink1URL=http://www.fairchildsemi.com/, ComponentLink2Description=Datasheet, ComponentLink2URL=http://www.fairchildsemi.com/ds/1N/1N4744A.pdf, ComponentLink3Description="Package Specification", ComponentLink3URL=http://www.fairchildsemi.com/dwg/DO/DO41A.pdf, DatasheetVersion="Rev. H3", IR (uA)=5, Mounting Technology="Through Hole", PackageDescription="2-Pin Axial leaded, Body 2.72 x 5.2 mm, Lead Spread 25.4 mm", PackageReference=DO-41-2, PackageVersion="Rev. 2", PartNumber=1N4748A, PD (W)=1, RoHS=TRUE, VZ (Max.) (V)=23.1, VZ (Min.) (V)=20.9, ZZ (Max) (ohm)=22
FuseHolder: "Undefined or Miscellaneous", Manufacturer_Name=LITTELFUSE, Mouser Part Number=576-0PTF0078P, Arrow Part Number=0PTF0078P, Arrow Price/Stock=https://www.arrow.com/en/products/0ptf0078p/littelfuse, Datasheet Link=https://media.digikey.com/pdf/Data%20Sheets/Littelfuse%20PDFs/PTF075_77_78.pdf, Height=11.5mm, Manufacturer_Part_Number=0PTF0078P, Mouser Price/Stock=https://www.mouser.co.uk/ProductDetail/Littelfuse/0PTF0078P?qs=Co4VkB5J4%2Fsczy6gG8s%2FsA%3D%3D
hall_IA hall_IB hall_IL: library part CMP-82923-000025-1, "SENSOR CURRENT HALL 20A AC/DC", Case/Package=SOIC, Current Sensing=20A, Frequency=80kHz, Max Input Voltage=5.5V, Max Operating Temperature=150°C, Max Supply Current=14mA, Min Input Voltage=4.5V, Min Operating Temperature=-40°C, Accuracy=3%, Height=1.5mm, Length=4.9mm, Linearity=1%, Mount="Surface Mount", Number of Channels=1, Number of Pins=8, Packaging="Tape and Reel", Polarity=Bidirectional, Response Time=5us, RoHS Compliant=Yes, Sensitivity=100mV/A, Width=3.9mm
HeatSink: "Hardware", Manufacturer_Name=Ohmite, Mouser Part Number=588-WV-DT2-101E, Datasheet Link=https://componentsearchengine.com/Datasheets/1/WV-DT2-101E.pdf, Height=32.3mm, Manufacturer_Part_Number=WV-DT2-101E, Mouser Price/Stock=https://www.mouser.com/Search/Refine.aspx?Keyword=588-WV-DT2-101E
IC1_Socket: "Connector", Manufacturer_Name=Amphenol, Mouser2 Part Number=649-DILB8P223TLF, Datasheet Link=https://componentsearchengine.com/Datasheets/1/DILB8P-223TLF.pdf, Height=5.25mm, Manufacturer_Part_Number=DILB8P-223TLF, Mouser2 Price/Stock=https://www.mouser.com/Search/Refine.aspx?Keyword=649-DILB8P223TLF
ICPOS1 ICPOS2 ICPOS3: "Integrated Circuit", Manufacturer_Name="Texas Instruments", Mouser Part Number=595-SN74LV1T34DBVRG4, Arrow Part Number=SN74LV1T34DBVRG4, Arrow Price/Stock=https://www.arrow.com/en/products/sn74lv1t34dbvrg4/texas-instruments, Datasheet Link=http://www.ti.com/lit/gpn/sn74lv1t34, Height=1.45mm, Manufacturer_Part_Number=SN74LV1T34DBVRG4, Mouser Price/Stock=https://www.mouser.co.uk/ProductDetail/Texas-Instruments/SN74LV1T34DBVRG4?qs=vdi0iO8H4N10R%252Bt%252BjmxZrg%3D%3D
MOV1 MOV2: "Varistor", Manufacturer_Name=LITTELFUSE, Mouser Part Number=576-V68ZS10P, Datasheet Link=http://www.littelfuse.com/~/media/electronics/datasheets/varistors/littelfuse_varistor_za_datasheet.pdf.pdf, Height=20mm, Manufacturer_Part_Number=V68ZS10P, Mouser Price/Stock=https://www.mouser.co.uk/ProductDetail/Littelfuse/V68ZS10P?qs=1%2FWRN91BpNvIRlTsONWDiQ%3D%3D
OP-AMP1 OP-AMP2: "Integrated Circuit", Arrow Part Number=LMC6482IN/NOPB, Manufacturer_Name="Texas Instruments", Mouser Part Number=926-LMC6482IN/NOPB, Arrow Price/Stock=https://www.arrow.com/en/products/lmc6482innopb/texas-instruments, Datasheet Link=http://www.ti.com/lit/gpn/lmc6482, Height=5.08mm, Manufacturer_Part_Number=LMC6482IN/NOPB, Mouser Price/Stock=https://www.mouser.co.uk/ProductDetail/Texas-Instruments/LMC6482IN-NOPB?qs=QbsRYf82W3EByDDrj8Vijg%3D%3D
PS1: library part RS3-243.3S, "24/3.3V Power Supply", Manufacturer_Name="RECOM Power", Mouser Part Number=919-RS3-243.3S, RS Part Number=0163748P, Datasheet Link=https://www.arrow.com/en/products/rs3-243.3s/recom-power, Height=11.35mm, Manufacturer_Part_Number=RS3-243.3S, Mouser Price/Stock=https://www.mouser.com/Search/Refine.aspx?Keyword=919-RS3-243.3S, RS Price/Stock=http://uk.rs-online.com/web/p/products/0163748P
PS2: "24/12V Power Supply", Manufacturer_Name="RECOM Power", Mouser Part Number=919-RS3-2412S, RS Part Number=1669097, Datasheet Link=https://www.recom-power.com/pdf/Econoline/RS3-S_D_Z.pdf, Manufacturer_Part_Number=RS3-2412S, Mouser Price/Stock=https://www.mouser.com/Search/Refine.aspx?Keyword=919-RS3-2412S, RS Price/Stock=https://uk.rs-online.com/web/p/products/1669097
PS3: library part RS3-2415S, "24/15V Power Supply", Manufacturer_Name="RECOM Power", Mouser Part Number=919-RS3-2415S, Datasheet Link=https://www.recom-power.com/pdf/Econoline/RS3-S_D_Z.pdf, Height=11.35mm, Manufacturer_Part_Number=RS3-2415S, Mouser Price/Stock=https://www.mouser.com/Search/Refine.aspx?Keyword=919-RS3-2415S
R1:1 R1:2 R1:3 R1:4 R1:5 R1:6 R1:7 Rshunt: "Resistor", LatestRevisionDate=17-Jul-2002, LatestRevisionNote="Re-released for DXP Platform.", PackageDescription="Axial Device, Thru-Hole; 2 Leads; 0.3 in Pin Spacing", PackageReference=AXIAL-0.3, Published=8-Jun-2000, Publisher="Altium Limited"
R1:8: "1/4W 16ohm Resistor", LatestRevisionDate=17-Jul-2002, LatestRevisionNote="Re-released for DXP Platform.", PackageDescription="Axial Device, Thru-Hole; 2 Leads; 0.3 in Pin Spacing", PackageReference=AXIAL-0.3, Published=8-Jun-2000, Publisher="Altium Limited"
Rboot: library part Res1, "1/2W 10ohm Resistor", LatestRevisionDate=17-Jul-2002, LatestRevisionNote="Re-released for DXP Platform.", PackageDescription="Axial Device, Thru-Hole; 2 Leads; 0.3 in Pin Spacing", PackageReference=AXIAL-0.3, Published=8-Jun-2000, Publisher="Altium Limited"
Rdiv1: library part Res1, "1/4W 62.727K ohm Resistor", LatestRevisionDate=17-Jul-2002, LatestRevisionNote="Re-released for DXP Platform.", PackageDescription="Axial Device, Thru-Hole; 2 Leads; 0.3 in Pin Spacing", PackageReference=AXIAL-0.3, Published=8-Jun-2000, Publisher="Altium Limited"
Rdiv2 Rdiv4 Rdiv5 Rdiv6 Rgs1 Rgs2: library part Res1, "1/4W 10k ohm Resistor", LatestRevisionDate=17-Jul-2002, LatestRevisionNote="Re-released for DXP Platform.", PackageDescription="Axial Device, Thru-Hole; 2 Leads; 0.3 in Pin Spacing", PackageReference=AXIAL-0.3, Published=8-Jun-2000, Publisher="Altium Limited"
Rdiv3: library part Res1, "1/4W 135.455k ohm Resistor", LatestRevisionDate=17-Jul-2002, LatestRevisionNote="Re-released for DXP Platform.", PackageDescription="Axial Device, Thru-Hole; 2 Leads; 0.3 in Pin Spacing", PackageReference=AXIAL-0.3, Published=8-Jun-2000, Publisher="Altium Limited"
Roff:1 Roff:2: library part Res1, "1/4W 10ohm Resistor", LatestRevisionDate=17-Jul-2002, LatestRevisionNote="Re-released for DXP Platform.", PackageDescription="Axial Device, Thru-Hole; 2 Leads; 0.3 in Pin Spacing", PackageReference=AXIAL-0.3, Published=8-Jun-2000, Publisher="Altium Limited"
Ron:1 Ron:2: library part Res1, "1/4W 8ohm Resistor", LatestRevisionDate=17-Jul-2002, LatestRevisionNote="Re-released for DXP Platform.", PackageDescription="Axial Device, Thru-Hole; 2 Leads; 0.3 in Pin Spacing", PackageReference=AXIAL-0.3, Published=8-Jun-2000, Publisher="Altium Limited"
S1 S2: "MOSFET (N-Channel)", Manufacturer_Name=Infineon, Mouser Part Number=942-IRFB4615PBF, Arrow Part Number=IRFB4615PBF, Arrow Price/Stock=https://www.arrow.com/en/products/irfb4615pbf/infineon-technologies-ag, Datasheet Link=https://static6.arrow.com/aropdfconversion/fc085eb00e813bec65c58b34c53aeea1d8b02a1f/irfb4615pbf.pdf, Height=4.83mm, Manufacturer_Part_Number=IRFB4615PBF, Mouser Price/Stock=https://www.mouser.co.uk/ProductDetail/Infineon-Technologies/IRFB4615PBF?qs=9%252BKlkBgLFf20BbweusQYXA%3D%3D
TVS1 TVS2: "TVS Diode (Uni-directional)", Manufacturer_Name=Vishay, Manufacturer_Part_Number=P6KE91A-E3/54, Datasheet Link=https://www.mouser.com/datasheet/2/427/p6ke-1767850.pdf
UDSP: "F280049C", Parameter 1="test 2"

## Free pads (board coordinates)
  round 60 hole 167 unplated: M1(175,175) M2(175,4825) M3(5825,4825) M4(5800,175)

## Via types
v1: diameter 50, hole 28, Top Layer to Bottom Layer, 47 vias

## Nets (pads, with @x,y where several pads share a name; then routed paths per layer and width w, separated by ;. In a path a pad name is that pad's centre, name@x,y a point inside that pad or via, vN(x,y) a via of type N, cw(c..) or ccw(c..) an arc to the next point about the centre after c; other vN are vias at no path point)
3.3V: 3Terminal:1.1 Cs:1.1 Cs:2.1 hall_IA.8 hall_IB.8 hall_IL.8 ICPOS1.5 ICPOS2.5 ICPOS3.5 OP-AMP1.8 OP-AMP2.8 PS1.6 UDSP.1 | length 439.6
  Top Layer w10: ICPOS3.5 1210.41,4006.2 1288.8,4006.2 v1(1290,4005) ; ICPOS2.5 1210.41,4151.2 1288.8,4151.2 v1(1290,4150) ; ICPOS1.5 1215.41,4286.2 1293.8,4286.2 v1(1295,4285)
  Bottom Layer w10: hall_IB.8 5482.4,680 5507.35,655.06 5507.35,637.65 v1(5515,630) ; hall_IA.8 5487.4,1030 5506.96,1010.45 5514.55,1010.45 v1(5545,980)
  other v1: 1300,1955 635,3060
5V: 5Terminal:1.1 Rdiv5.2 Rdiv6.1 | length 70
  Top Layer w10: Rdiv5.2 Rdiv6.1
  other v1: 635,3368.57
12V: Cby8.1 IC1_Socket.5 PS2.6 Rboot.2 | length 108.7
  Top Layer w10: Cby8.1 1994.92,2105 2009.92,2120 IC1_Socket.5
  other v1: 1100,2630
15V: C2.1 C6:4.1 C6:5.1 C6:7.1 C6:9.1 DZ:4.2 PS3.6 U.1 U.10 U.14 U.18 | length 1173.8
  Bottom Layer w10: C2.1 3300.79,492.17 DZ:4.2 3595,483.31 3704.25,374.06 C6:9.1 3735.75,374.06 3750.43,388.74 3750.43,391.81 3809.57,450.94 C6:4.1 3875.75,450.94 3899.8,475 U.18 ; C6:5.1 3860.75,800.94 3884.8,825 U.14 ; C6:7.1 3859.06,1175 U.10
  other v1: 1120,1525
24V: 24V.2 FuseHolder.1 | length 15.1
  Top Layer w10: 24V.2@240,650 24V.2@255.06,650
GND: 3Terminal:1.3 5Terminal:1.5 24V.1 "48V test.2" C1:1.2 C1:2.2 C1:3.2 C1:4.2 C1:5.2 C1:6.2 C1:7.1 C2.2 C6:4.2 C6:5.2 C6:7.2 C6:8.2 C6:9.2 C7.2 Cby1.2 Cby2.2 Cby3.2 Cby4.2 Cby5.2 Cby6.2 Cby7.2 Cby8.2 Cdc24V.2 Cdc48V.2 Cfilter1.2 Cfilter2.2 Cs:1.2 Cs:2.2 DZ:4.1 hall_IA.5 hall_IB.5 hall_IL.5 HeatSink.1 HeatSink.2 HeatSink.3 HeatSink.4 IC1_Socket.3 ICPOS1.3 ICPOS2.3 ICPOS3.3 MOV1.2 MOV2.2 OP-AMP1.4 OP-AMP2.4 PS1.1 PS1.7 PS2.1 PS2.7 PS3.1 PS3.7 Rdiv2.1 Rdiv4.1 Rdiv6.2 Rgs2.2 Rshunt.1 S1.3 TVS1.2 TVS2.2 U.2 UDSP.22 | length 5047.9
  Top Layer w10: OP-AMP1.4 793.7,1576.18 890.12,1479.76 Cfilter1.2 ; v1(1013.17,4192.01) 1024,4192.01 1044.58,4212.6 ICPOS1.3 ; v1(1018.17,4052.01) 1023.57,4052.01 1049.16,4077.6 ICPOS2.3 ; v1(1020,3910) 1030.82,3910 1053.42,3932.6 ICPOS3.3 ; hall_IL.5 1455,1760.37 1460.24,1765.61 1752.14,1765.61 HeatSink.1 1756.54,1796.72 1852.52,1892.71 Cby8.2 ; v1(2670,1185) 2670,1299.33 Cby3.2@2670.67,1300 ; Cby4.2@3686.3,1383.97 Cby4.2 3686.3,1511.92 Cby5.2 3691.3,1516.92 Cby6.2 Cby6.2@3691.3,1641.03 ; v1(3720,945) v1@3720,946.88 ; U.2@3824.96,1805 U.2 ; Cby7.2 5324.33,260 v1(5395,260)
  Bottom Layer w10: Cby1.2@2708.14,1575.56 2709.17,1575.56 2738.7,1546.03 Cby1.2 ; Cby2.2@2738.7,1420 Cby2.2 ; C2.2 3260,178.03 TVS2.2 ; OP-AMP2.4 3336.3,2210 Cfilter2.2 ; DZ:4.1 3595,146.69 3704.25,255.94 C6:9.2 ; C6:5.2 3750.62,919.06 3724.68,945 v1(3720,945) ; C6:7.2 3819.57,1269.37 v1(3720,945) ; C6:4.2 3844.25,569.06 3809.25,604.06 3808.15,604.06 3720,692.2 v1(3720,945) ; v1(4005,2290) 4005,2171.42 C1:4.2 ; C1:5.2 v1(4090,2395) ; C1:6.2 v1(4175,2505) ; C6:8.2 4209.69,1564.37 4291.93,1564.37 4421.3,1435 Rshunt.1 ; v1(4700,2280) 4700,2161.42 C1:1.2 ; C1:2.2 v1(4785,2400) ; C1:3.2 v1(4880,2465) ; C7.2 5209.69,405.63 5245.63,405.63 v1(5300,460) ; hall_IB.5@5461.18,835 hall_IB.5 5458.35,827.83 5647.17,827.83 Cs:2.2 ; hall_IA.5 5490,1180 5620.19,1310.19 5645.19,1310.19 Cs:1.2
  other v1: 1120,1375 2550,1635 1380,2515 2920,2565 5300,2645 630,3240
Net3Terminal:1_2: 3Terminal:1.2 UDSP.64 | length 3617
  Top Layer w10: 3Terminal:1.2 320,3335 815,3830 v1(2845,3830)
  Bottom Layer w10: UDSP.64 2845,4555 v1(2845,3830)
Net3Terminal:2_1: 3Terminal:2.1 hall_IA.3 hall_IA.4
  other v1: 5275,1255
Net3Terminal:2_2: 3Terminal:2.2 hall_IB.3 hall_IB.4
  other v1: 5275,905
Net3Terminal:2_3: 3Terminal:2.3 U.26
Net5Terminal:1_2: 5Terminal:1.2 ICPOS1.2 | length 855.5
  Top Layer w10: 5Terminal:1.2 656.02,4370 776.02,4250 ICPOS1.2
Net5Terminal:1_3: 5Terminal:1.3 ICPOS2.2 | length 823.6
  Top Layer w10: 5Terminal:1.3 686.02,4170 741.02,4115 ICPOS2.2
Net5Terminal:1_4: 5Terminal:1.4 ICPOS3.2 | length 800.8
  Top Layer w10: 5Terminal:1.4 ICPOS3.2
"Net48V test_1": "48V test.1" C7.1 Cby1.1 Cby2.1 Cby3.1 Cby4.1 Cby5.1 Cby6.1 Cby7.1 Cdc48V.1 MOV2.1 Rdiv3.2 S2.2 TVS2.1 U.27
  other v1: 3590,730 2865,1265 3045,1265
NetBobbin_1: Bobbin.1 Bobbin.2 Bobbin.3 Bobbin.4 Bobbin.5 hall_IL.3 hall_IL.4
NetC1:1_1: C1:1.1 R1:1.1 U.9 | length 1198
  Top Layer w10: U.9 4000.16,1295.35 4584.81,1880 v1(4700,1880)
  Bottom Layer w10: v1(4700,1880) 4702.5,1882.5 4702.5,1997.5 R1:1.1 C1:1.1
NetC1:2_1: C1:2.1 R1:2.1 U.13 | length 1636.5
  Top Layer w10: U.13 4013.94,895 4076.07,957.14 4076.07,986.06 4291.73,1201.71 4326.9,1201.71 4790,1664.81 v1(4790,1880)
  Bottom Layer w10: C1:2.1 4790,2168.58 R1:2.1 v1(4790,1880)
NetC1:3_1: C1:3.1 R1:3.1 U.17 | length 2084.6
  Top Layer w10: U.17 4002.79,545 4021.82,564.02 4021.82,566.66 4880,1424.84 v1(4880,1880)
  Bottom Layer w10: v1(4880,1880) R1:3.1 C1:3.1
NetC1:4_1: C1:4.1 R1:4.1 U.3 | length 437.6
  Bottom Layer w10: U.3 3852.52,1735 4010,1892.48 R1:4.1 C1:4.1
NetC1:5_1: C1:5.1 R1:5.1 U.4 | length 639.9
  Bottom Layer w10: U.4 3852.52,1665 4095,1907.48 R1:5.1 4095,2183.58 C1:5.1
NetC1:6_1: C1:6.1 R1:6.1 U.5 | length 860.9
  Bottom Layer w10: U.5 3852.52,1595 4175,1917.48 R1:6.1 C1:6.1
NetC1:7_2: C1:7.2 R1:7.2 UDSP.15 | length 1805.5
  Top Layer w10: C1:7.2 4620,2460 UDSP.15
  Bottom Layer w10: R1:7.2 C1:7.2
NetC6:8_1: C6:8.1 R1:8.1 U.8 | length 534.3
  Bottom Layer w10: U.8 3852.52,1385 3928.46,1460.94 C6:8.1 4210.75,1460.94 4226.69,1445 R1:8.1
NetCboot_1: Cboot.1 Dboot.1 IC1_Socket.8 | length 643.4
  Top Layer w10: IC1_Socket.8 2475,2275 Cboot.1 2476.03,2343.7 2505.56,2373.22 2505.56,2375.56 Dboot.1
NetCdc24V_1: Cdc24V.1 FuseHolder.2 hall_IL.1 hall_IL.2 MOV1.1 PS1.2 PS2.2 PS3.2 Rdiv1.2 Rdiv5.1 TVS1.1
NetCfilter1_1: Cfilter1.1 OP-AMP1.3 Rdiv1.1 Rdiv2.2 | length 525.1
  Top Layer w10: Rdiv1.1 Rdiv2.2 ; Cfilter1.1 779.88,1479.76 749.65,1510 Rdiv2.2 ; OP-AMP1.3 690,1671.3 Rdiv2.2
NetCfilter2_1: Cfilter2.1 OP-AMP2.3 Rdiv3.1 Rdiv4.2 | length 953.4
  Bottom Layer w10: OP-AMP2.3 3579.88,2275 3630.12,2224.76 Cfilter2.1 3630.12,2195.24 3705,2120.35 Rdiv4.2 3565,1830 Rdiv3.1
NetD1_1: D1.1 Roff:1.2 | length 85
  Bottom Layer w10: D1.1 Roff:1.2
NetD1_2: D1.2 Rgs1.1 Ron:1.2 S2.1 | length 630.6
  Bottom Layer w10: Ron:1.2 2680,1750 D1.2 2814.76,1695.24 S2.1 2840,1822.79 2820,1842.79 Rgs1.1
NetD2_1: D2.1 Roff:2.2 | length 116.8
  Top Layer w10: Roff:2.2@1721.37,2003.63 Roff:2.2
  Bottom Layer w10: D2.1 1696.13,2003.63 Roff:2.2@1721.37,2003.63
NetD2_2: D2.2 Rgs2.1 Ron:2.2 S1.1 | length 721.6
  Bottom Layer w10: Ron:2.2 1530,1780 D2.2 S1.1 1940,1770 Rgs2.1
NetDboot_2: Dboot.2 Rboot.1 | length 185.4
  Top Layer w10: Dboot.2 1599.51,2594.51 1599.51,2410.49 Rboot.1
Nethall_IA_1: hall_IA.1 hall_IA.2 U.24
Nethall_IA_7: hall_IA.7 UDSP.26 | length 3825.5
  Top Layer w10: UDSP.26 5525.51,4174.49 5525.51,2035.51 v1(5495,2005)
  Bottom Layer w10: hall_IA.7 5434.96,1080 5390,1124.96 5390,1178.94 5460,1248.94 5460,1970 v1(5495,2005)
Nethall_IB_1: hall_IB.1 hall_IB.2 U.25
Nethall_IB_7: hall_IB.7 UDSP.27 | length 4185.9
  Top Layer w10: UDSP.27 5425.51,4174.49 5425.51,2036.06 5400,2010.54 v1(5400,2005)
  Bottom Layer w10: v1(5400,2005) 5440,1965 5440,1257.22 5365,1182.22 5365,794.96 5429.96,730 hall_IB.7
Nethall_IL_7: hall_IL.7 UDSP.69 | length 3397.1
  Top Layer w10: hall_IL.7 1355,1800 v1(1390,1835)
  Bottom Layer w10: v1(1390,1835) 1445,1890 1445,3949.36 2161.15,4665.51 2234.49,4665.51 UDSP.69
NetIC1_Socket_2: IC1_Socket.2 UDSP.9 | length 3692.8
  Top Layer w10: IC1_Socket.2 2464.14,2664.14 2488.5,2664.14 2725.51,2901.15 2725.51,2929.88 2761.15,2965.51 2789.88,2965.51 2825.51,3001.15 2825.51,3029.88 3110.64,3315 v1(3625,3315)
  Bottom Layer w10: v1(3625,3315) 4725.51,4415.51 4725.51,4629.88 4770.24,4674.6 4770.24,4710.24 UDSP.9
NetICPOS1_4: ICPOS1.4 UDSP.13 | length 4238.9
  Top Layer w10: ICPOS1.4 3651.77,4212.6 4825.51,3038.85 4825.51,2974.49 UDSP.13
NetICPOS2_4: ICPOS2.4 UDSP.12 | length 4088
  Top Layer w10: ICPOS2.4 3686.77,4077.6 4725.51,3038.85 4725.51,2974.49 UDSP.12
NetICPOS3_4: ICPOS3.4 UDSP.11 | length 3890.2
  Top Layer w10: ICPOS3.4 3667.4,3932.6 UDSP.11
NetOP-AMP1_1: OP-AMP1.1 OP-AMP1.2 UDSP.23 | length 5982.7
  Top Layer w10: OP-AMP1.2 OP-AMP1.1 ; v1(1340,2700) 1518.7,2700 2233.7,3415 3840,3415 v1(3880,3455)
  Bottom Layer w10: OP-AMP1.1 793.7,2083.7 1340,2630 v1(1340,2700) ; v1(3880,3455) 4875,4450 5374.14,4450 5380,4455.86 UDSP.23
NetOP-AMP2_1: OP-AMP2.1 OP-AMP2.2 UDSP.70 | length 2709.5
  Bottom Layer w10: UDSP.70 2180,4300 3301.3,3178.7 OP-AMP2.1 OP-AMP2.2
NetR1:1_2: R1:1.2 UDSP.36 | length 1980.1
  Bottom Layer w10: R1:1.2 5052.44,2047.44 5135.91,2047.44 5670,2581.53 5670,3113.28 5653.28,3130 5290,3130 UDSP.36
NetR1:2_2: R1:2.2 UDSP.38 | length 1587.4
  Bottom Layer w10: R1:2.2 5130.5,2130.5 5190.69,2130.5 5650,2589.81 5650,3105 5465,3105 UDSP.38
NetR1:3_2: R1:3.2 UDSP.40 | length 1043.7
  Bottom Layer w10: R1:3.2 5625.86,2625.86 5625.86,2939.74 5589.76,2975.83 5589.76,3010.24 UDSP.40
NetR1:4_2: R1:4.2 UDSP.35 | length 1371.6
  Bottom Layer w10: R1:4.2 4310,2165.79 4925.51,2781.3 4925.51,2929.88 4970.12,2974.49 5034.49,2974.49 UDSP.35
NetR1:5_2: R1:5.2 UDSP.37 | length 1326.6
  Bottom Layer w10: R1:5.2 4395,2200.19 4764.2,2569.39 4793.75,2569.39 5125.51,2901.15 5125.51,2929.88 5170.12,2974.49 5234.49,2974.49 UDSP.37
NetR1:6_2: R1:6.2 UDSP.39 | length 1349.5
  Bottom Layer w10: R1:6.2 4483.63,2228.63 4503.63,2228.63 4780,2505 4900.64,2505 5270.39,2874.76 5274.54,2874.76 5275.05,2874.76 ccw(c5280,2920) 5325.24,2924.95 5325.24,2925.46 5325.24,2929.61 5370.12,2974.49 5434.49,2974.49 UDSP.39
NetR1:7_1: R1:7.1 U.6 | length 861.5
  Bottom Layer w10: R1:7.1 3402.44,1867.44 3402.44,1812.37 3689.81,1525 U.6
NetR1:8_2: R1:8.2 Rshunt.2 U.21 U.22 U.23 | length 1092.3
  Bottom Layer w10: R1:8.2 4340,1740 4495,1740 Rshunt.2 4565,1670 U.22 ; U.23 U.22 ; U.21 U.22
TP5: IC1_Socket.7 Roff:1.1 Ron:1.1 | length 815.3
  Bottom Layer w10: IC1_Socket.7 2300,2200 Ron:1.1 2680,2350 Roff:1.1 v1(2820,2470)
TP6: IC1_Socket.4 Roff:2.1 Ron:2.1 | length 756.6
  Bottom Layer w10: v1(1522.5,2287.5) 1526.25,2283.75 1526.25,2143.75 Ron:2.1 1685,2295 Roff:2.1 1895,2295 IC1_Socket.4
TP7: Bobbin.6 Bobbin.7 Bobbin.8 Bobbin.9 Bobbin.10 Cboot.2 IC1_Socket.6 Rgs1.2 S1.2 S2.3 | length 1240.2
  Top Layer w10: IC1_Socket.6 2120.95,2120.95 2158.62,2120.95 2473.97,2436.3 Cboot.2 2525.56,2436.3 2600.03,2510.77 2600.03,2579.82 2674.5,2654.29 v1(2879.29,2654.29) v1@2880,2655
  Bottom Layer w10: S2.3 3040,1775 Rgs1.2
TP8: IC1_Socket.1 UDSP.80 | length 1025.4
  Top Layer w10: IC1_Socket.1 2367.4,2420 2792.4,2845 2869.36,2845 2925.51,2901.15 2925.51,2929.88 2970.12,2974.49 3034.49,2974.49 UDSP.80
VBU: C3:1.1 C6:1.1 DZ:1.2 U.11 | length 901.6
  Bottom Layer w10: U.11 3971.69,1075.35 4085.12,1188.78 4085.12,1282.28 DZ:1.2 4150,1338.31 4279.25,1209.06 C6:1.1 4310.75,1209.06 4336.34,1234.65 C3:1.1
VBV: C3:2.1 C6:2.1 DZ:2.2 U.15 | length 813.1
  Bottom Layer w10: U.15 3971.69,725.35 4150,903.66 DZ:2.2 4161.14,907.17 4284.25,784.06 C6:2.1 4315.75,784.06 4336.34,804.65 C3:2.1
VBW: C3:3.1 C6:3.1 DZ:3.2 U.19 | length 764.7
  Bottom Layer w10: U.19 4073.19,375.35 DZ:3.2 4151.14,452.17 4279.25,324.06 C6:3.1 4310.75,324.06 4331.34,344.65 C3:3.1
VSU: C3:1.2 C6:1.2 DZ:1.1 U.12 | length 713.2
  Bottom Layer w10: U.12 3839.65,993.74 4149.09,993.74 DZ:1.1 4248.11,1090.94 C6:1.2 4474.41,1090.94 C3:1.2
VSV: C3:2.2 C6:2.2 DZ:2.1 U.16 | length 773.8
  Bottom Layer w10: U.16 3971.69,644.65 4063.51,552.83 DZ:2.1 4248.43,651.26 4285.31,651.26 C6:2.2 4315.75,665.94 4346.34,635.35 C3:2.2
VSW: C3:3.2 C6:3.2 DZ:3.1 U.20 | length 812.6
  Bottom Layer w10: U.20 3953.19,294.65 DZ:3.1 4243.42,191.26 4280.31,191.26 C6:3.2 4483.5,205.94 4510,179.45 C3:3.2
pads on no net: hall_IA.6 hall_IB.6 hall_IL.6 ICPOS1.1 ICPOS2.1 ICPOS3.1 OP-AMP1.5 OP-AMP1.6 OP-AMP1.7 OP-AMP2.5 OP-AMP2.6 OP-AMP2.7 PS1.3 PS1.5 PS1.8 PS2.3 PS2.5 PS2.8 PS3.3 PS3.5 PS3.8 U.7 UDSP.2 UDSP.3 UDSP.4 UDSP.5 UDSP.6 UDSP.7 UDSP.8 UDSP.10 UDSP.14 UDSP.16 UDSP.17 UDSP.18 UDSP.19 UDSP.20 UDSP.21 UDSP.24 UDSP.25 UDSP.28 UDSP.29 UDSP.30 UDSP.31 UDSP.32 UDSP.33 UDSP.34 UDSP.41 UDSP.42 UDSP.43 UDSP.44 UDSP.45 UDSP.46 UDSP.47 UDSP.48 UDSP.49 UDSP.50 UDSP.51 UDSP.52 UDSP.53 UDSP.54 UDSP.55 UDSP.56 UDSP.57 UDSP.58 UDSP.59 UDSP.60 UDSP.61 UDSP.62 UDSP.63 UDSP.65 UDSP.66 UDSP.67 UDSP.68 UDSP.71 UDSP.72 UDSP.73 UDSP.74 UDSP.75 UDSP.76 UDSP.77 UDSP.78 UDSP.79

## Polygon pours and split planes (outlines as drawn)
NetCdc24V_1 on Top Layer "NONET_L01_P-001" (solid, pour order 107): 430,1170 1120,1170 1120,625 1080,585 920,585 920,595 560,955 555,950 430,950
NetCdc24V_1 on Top Layer "NETCDC24V_1_L01_P011" (solid, pour order 11): 1395,585 1080,585 1080,1375 1280,1615 1395,1615
"Net48V test_1" on Top Layer "NET48V_TEST_1_L01_P034" (solid, pour order 34): 3780,880 3475,1185 3475,1340 2740,1340 2740,1210 2740,120 3780,120
"Net48V test_1" on Top Layer "NET48V_TEST_1_L01_P035" (solid, pour order 35): 3523.24,410 5105,410 5255,300 5255,125 3520,125
GND on Top Layer "GND_L01_P106" (solid, pour order 106): 3635,1705 3645,1695 3645,890 3780,890 3780,1710 3645,1710
Net3Terminal:2_1 on Top Layer "NET3TERMINAL:2_1_L01_P087" (solid, pour order 87): 5225,1210 5225,945 5455,945 5650,750 5850,750 5850,875 5720,880 5330,1210
Net3Terminal:2_1 on Top Layer "NET3TERMINAL:2_1_L01_P086" (solid, pour order 86): 5225,1305 5330,1305 5330,1210 5225,1210
Net3Terminal:2_2 on Top Layer "NET3TERMINAL:2_2_L01_P080" (solid, pour order 80): 5425,945 5445,945 5700,690 5850,690 5850,560 5655,560 5425,790
Net3Terminal:2_2 on Top Layer "NET3TERMINAL:2_2_L01_P079" (solid, pour order 79): 5425,945 5425,785 5225,785 5225,945
Net3Terminal:2_3 on Top Layer "NET3TERMINAL:2_3_L01_P072" (solid, pour order 72): 5150.31,700 5402.34,505 5850,505 5850,355 5330,355 5150.31,534.68
Net3Terminal:2_3 on Top Layer "NET3TERMINAL:2_3_L01_P071" (solid, pour order 71): 4990,700 5165,700 5165,520 4990,520
3.3V on Top Layer "3.3V_L01_P063" (solid, pour order 63): 1065,2130 1065,1685 1340,1685 1340,2130
NetCdc24V_1 on Top Layer "NETCDC24V_1_L01_P042" (solid, pour order 42): 1025,2355 1025,3115 1015,3115 695,3115 695,2350
"Net48V test_1" on Top Layer "NET48V_TEST_1_L01_P040" (solid, pour order 40): 3525,565 3650,565 3650,405 3645,405 3525,395
"Net48V test_1" on Top Layer "NET48V_TEST_1_L01_P039" (solid, pour order 39): 3475,1340 3475,1185 3625,1185 3635,1195 3635,1705 3475,1705
"Net48V test_1" on Top Layer "NET48V_TEST_1_L01_P033" (solid, pour order 33): 3650,805 3650,565 3525,565 3525,805
TP7 on Top Layer "TP7_L01_P026" (solid, pour order 26): 1990,1735 2075,1820 2075,2175 2165,2175 2165,1735
TP7 on Top Layer "TP7_L01_P019" (solid, pour order 19): 1990,1735 1990,1380 2530,1380 2175,1735
TP7 on Top Layer "TP7_L01_P025" (solid, pour order 25): 2980,1380 2530,1380 2415,1495 2980,1495
TP7 on Top Layer "TP7_L01_P024" (solid, pour order 24): 2974.86,1735 3115,1735 3115,1390 3115,1385 3115,1380 2980,1380
TP7 on Top Layer "TP7_L01_P018" (solid, pour order 18): 2580,395 2575,400 2450,400 2450,1380 2575,1380
NetBobbin_1 on Top Layer "NETBOBBIN_1_L01_P017" (solid, pour order 17): 1685,1206.53 1685,395 1555,395 1555,1336.53
NetBobbin_1 on Top Layer "NETBOBBIN_1_L01_P016" (solid, pour order 16): 1370,1609.41 1370,1515 1685,1200 1685,1395 1465,1615
NetCdc24V_1 on Top Layer "NETCDC24V_1_L01_P008" (solid, pour order 8): 450,950 70,950 70,3130 1025,3130 1025,2245 920,2140 695,2140 695,2120 450,1875
"Net48V test_1" on Bottom Layer "NET48V_TEST_1_L04_P103" (solid, pour order 103): 2795,1335 2795,1210 3345,1210 3375,1180 3380,1185 3510,1185 3510,1315 3485,1340
Net3Terminal:2_1 on Bottom Layer "NET3TERMINAL:2_1_L04_P085" (solid, pour order 85): 5333.47,1100 5225,1100 5225,1305 5335,1305
Nethall_IB_1 on Bottom Layer "NETHALL_IB_1_L04_P074" (solid, pour order 74): 4995,1005 5175,1005 5175,690 4995,690
Nethall_IA_1 on Bottom Layer "NETHALL_IA_1_L04_P084" (solid, pour order 84): 5150,1135 5185,1100 5340,1100 5335,1095 5335,1000 4995,1000 4995,1105
Nethall_IA_1 on Bottom Layer "NETHALL_IA_1_L04_P082" (solid, pour order 82): 4995,1300 5155,1300 5155,1105 4995,1105
Net3Terminal:2_2 on Bottom Layer "NET3TERMINAL:2_2_L04_P081" (solid, pour order 81): 5215,860 5215,945 5330,945 5330,860
Net3Terminal:2_2 on Bottom Layer "NET3TERMINAL:2_2_L04_P076" (solid, pour order 76): 5215,860 5330,860 5330,750 5215,750
Nethall_IB_1 on Bottom Layer "NETHALL_IB_1_L04_P075" (solid, pour order 75): 5165,775 5185,755 5330,755 5330,650 5165,650
GND on Bottom Layer "GND_L04_P070" (solid, pour order 70): 2500,1675 2600,1675 2600,1625 2625,1600 2785,1600 2785,1350 2500,1350
"Net48V test_1" on Bottom Layer "NET48V_TEST_1_L04_P068" (solid, pour order 68): 5120,360 5120,195 5195,195 5195,360
"Net48V test_1" on Bottom Layer "NET48V_TEST_1_L04_P067" (solid, pour order 67): 5140,565 5140,465 5250,465 5250,565
"Net48V test_1" on Bottom Layer "NET48V_TEST_1_L04_P036" (solid, pour order 36): 5145,565 4975,565 4975,200 4980,195 5145,195
"Net48V test_1" on Bottom Layer "NET48V_TEST_1_L04_P027" (solid, pour order 27): 2995,1735 2885,1735 2885,1600 2795,1600 2795,1335 2995,1335
"Net48V test_1" on PWR "NET48V_TEST_1_L02_P030" (solid, pour order 30): 2620,1300 2620,120 3760,120 3760,1300
"Net48V test_1" on PWR "NET48V_TEST_1_L02_P028" (solid, pour order 28): 3005,1340 2655,1340 2620,1305 2620,1210 3005,1210
"Net48V test_1" on PWR "NET48V_TEST_1_L02_P104" (solid, pour order 104): 3537.61,1675 4325,1675 5480,520 5480,125 3520,125
3.3V on PWR "3.3V_L02_P065" (solid, pour order 65): 3070,2600 3070,2185 4290,2185 4290,1690 5600,380 5800,380 5800,999.85 4192.95,2606.9
5V on PWR "5V_L02_P088" (solid, pour order 88): 950,3475 945,3480 945,4695 85,4695 85,3310 715,3310 950,3310
12V on PWR "12V_L02_P094" (solid, pour order 94): 1125,2575 1535,2165 1905,2165 1905,2665 1870,2700